# Altium PCB BMS.PcbDoc (part 1 of 2)
Units mm, origin at the board's own origin, x right, y up, seen from the top; angles counter-clockwise.
Board outline 65 x 65 mm, 2 copper layers (Top Layer, Bottom Layer); 122 components, 118 nets, 436 pads, 115 vias.
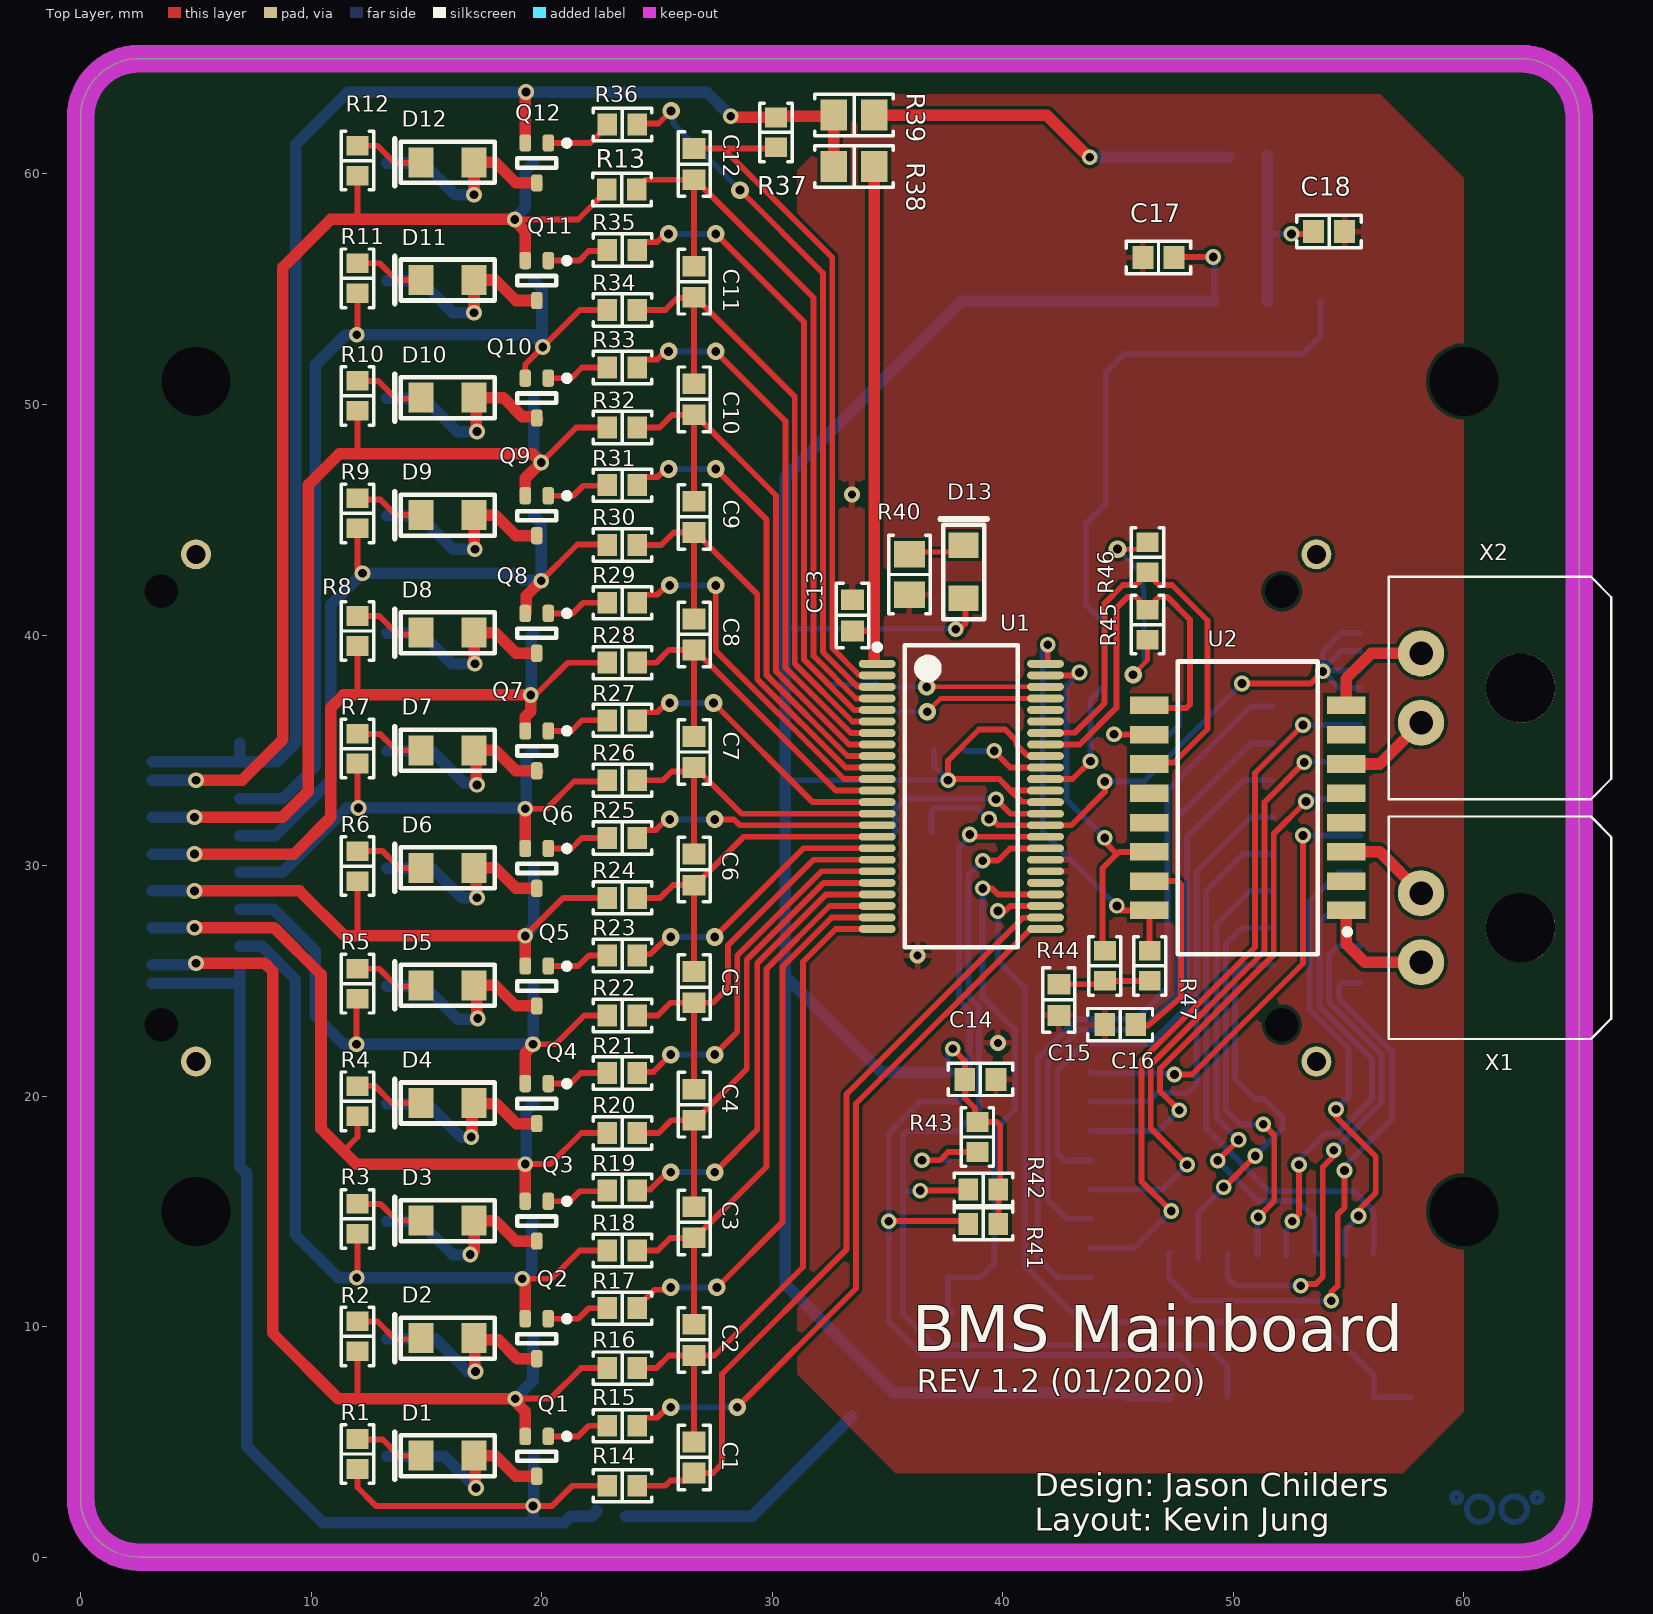
[diagram p0: Top Layer view]
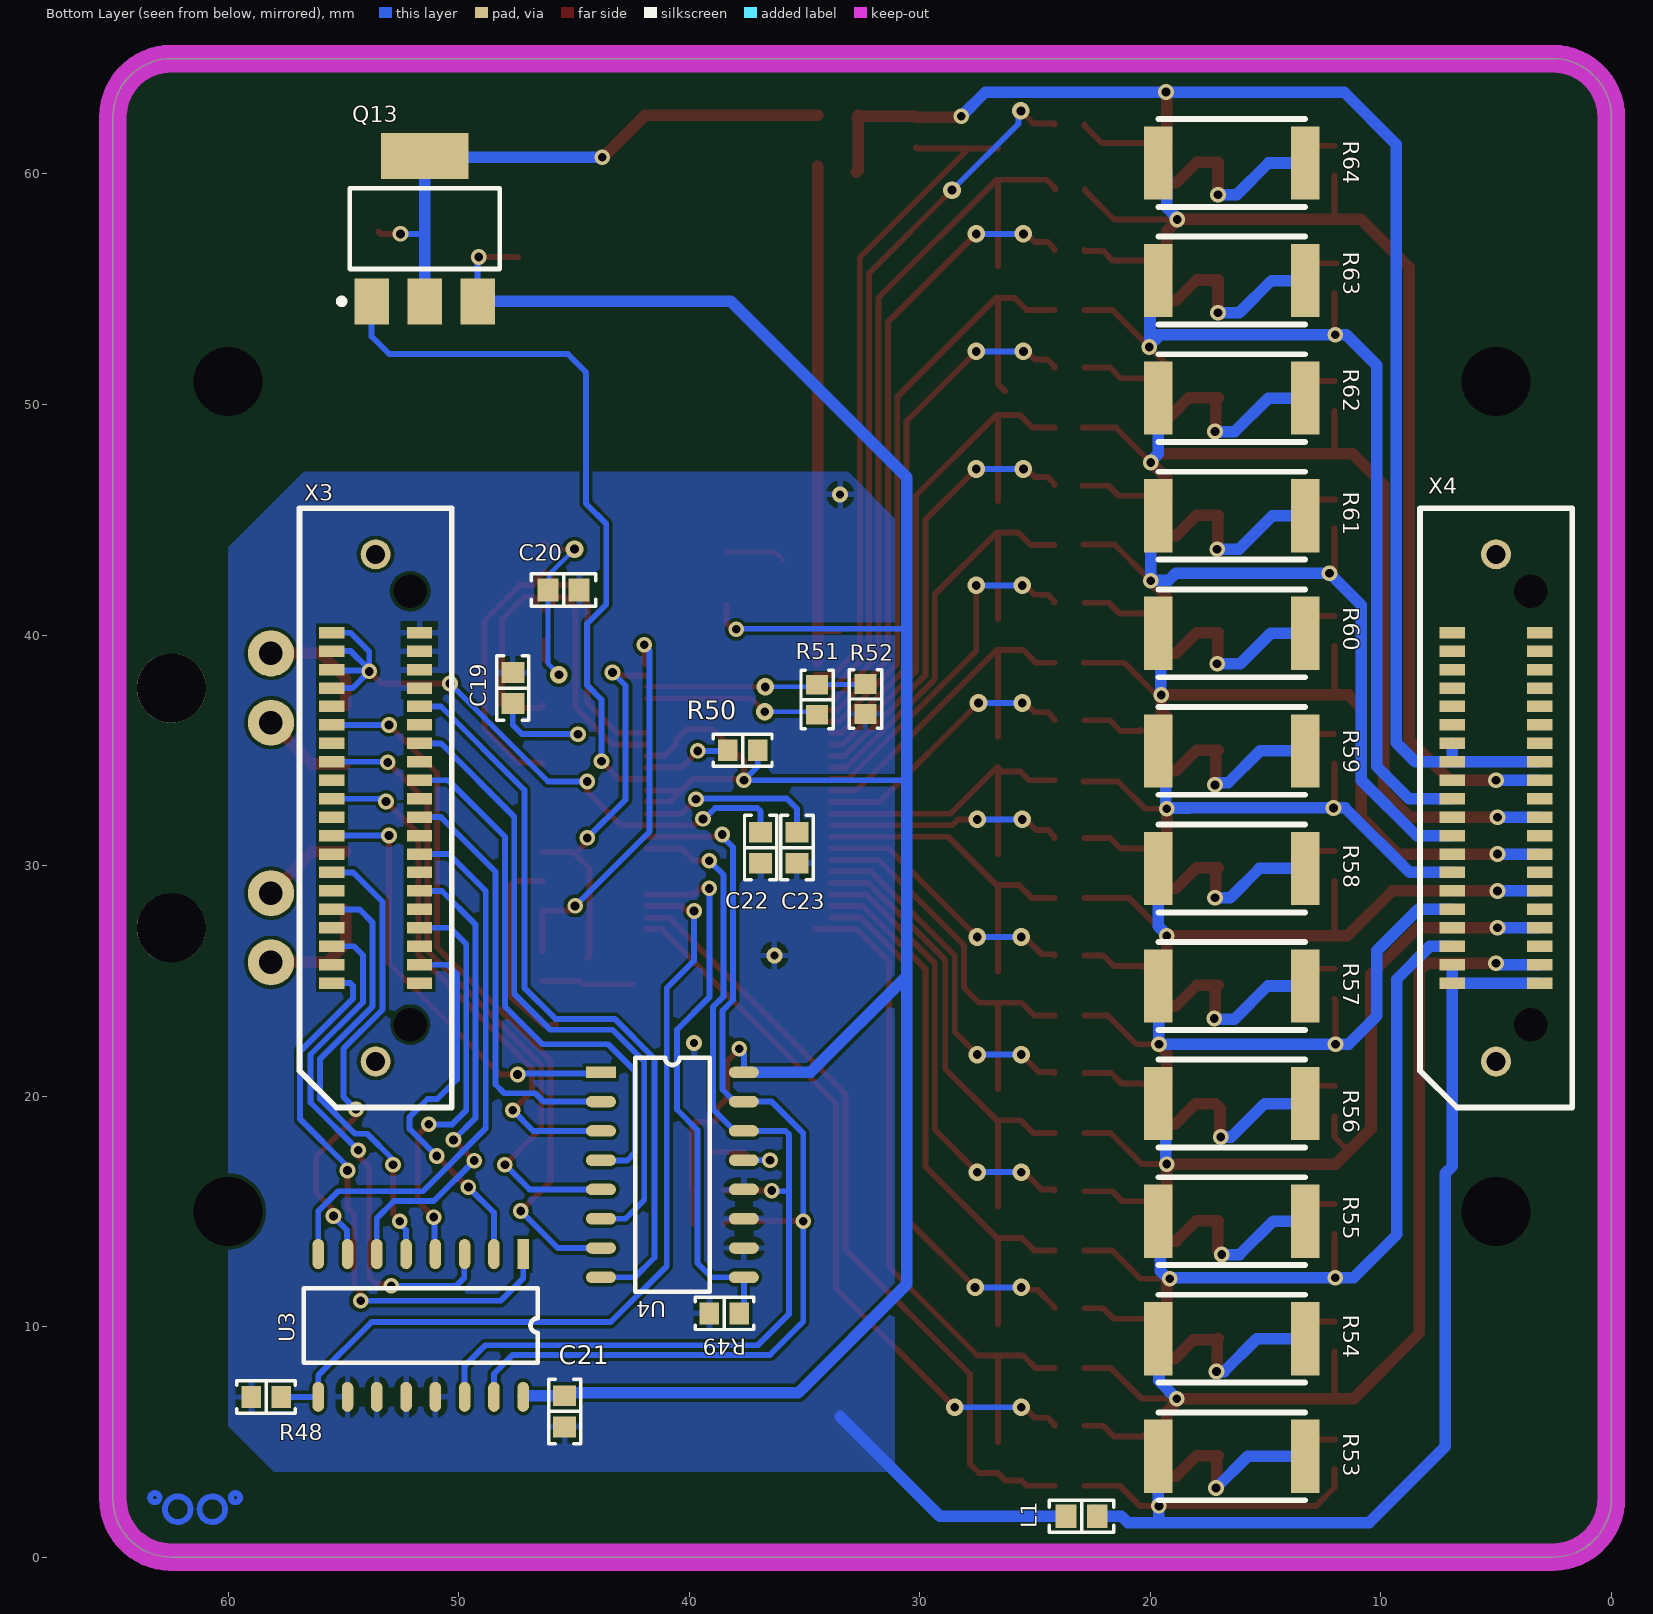
[diagram p1: Bottom Layer view, seen from below]
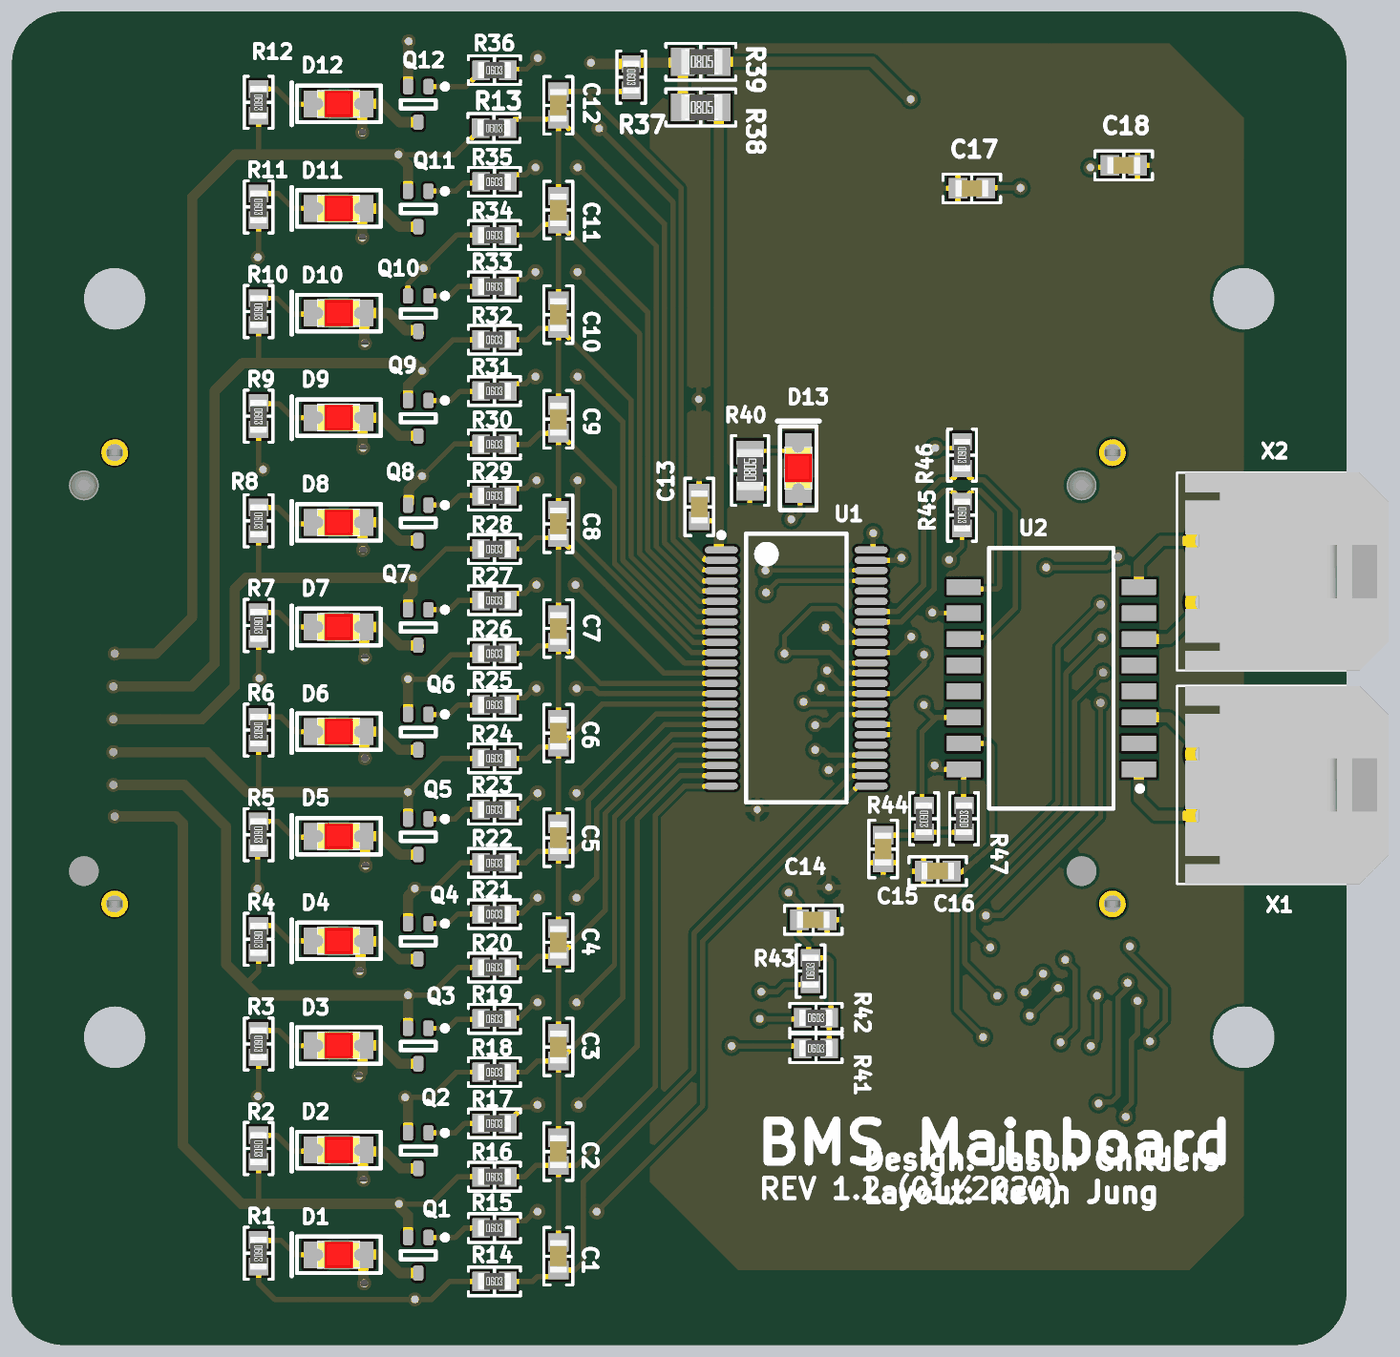
[diagram p2: 3D render of the assembled board from above, using the file's embedded part models]
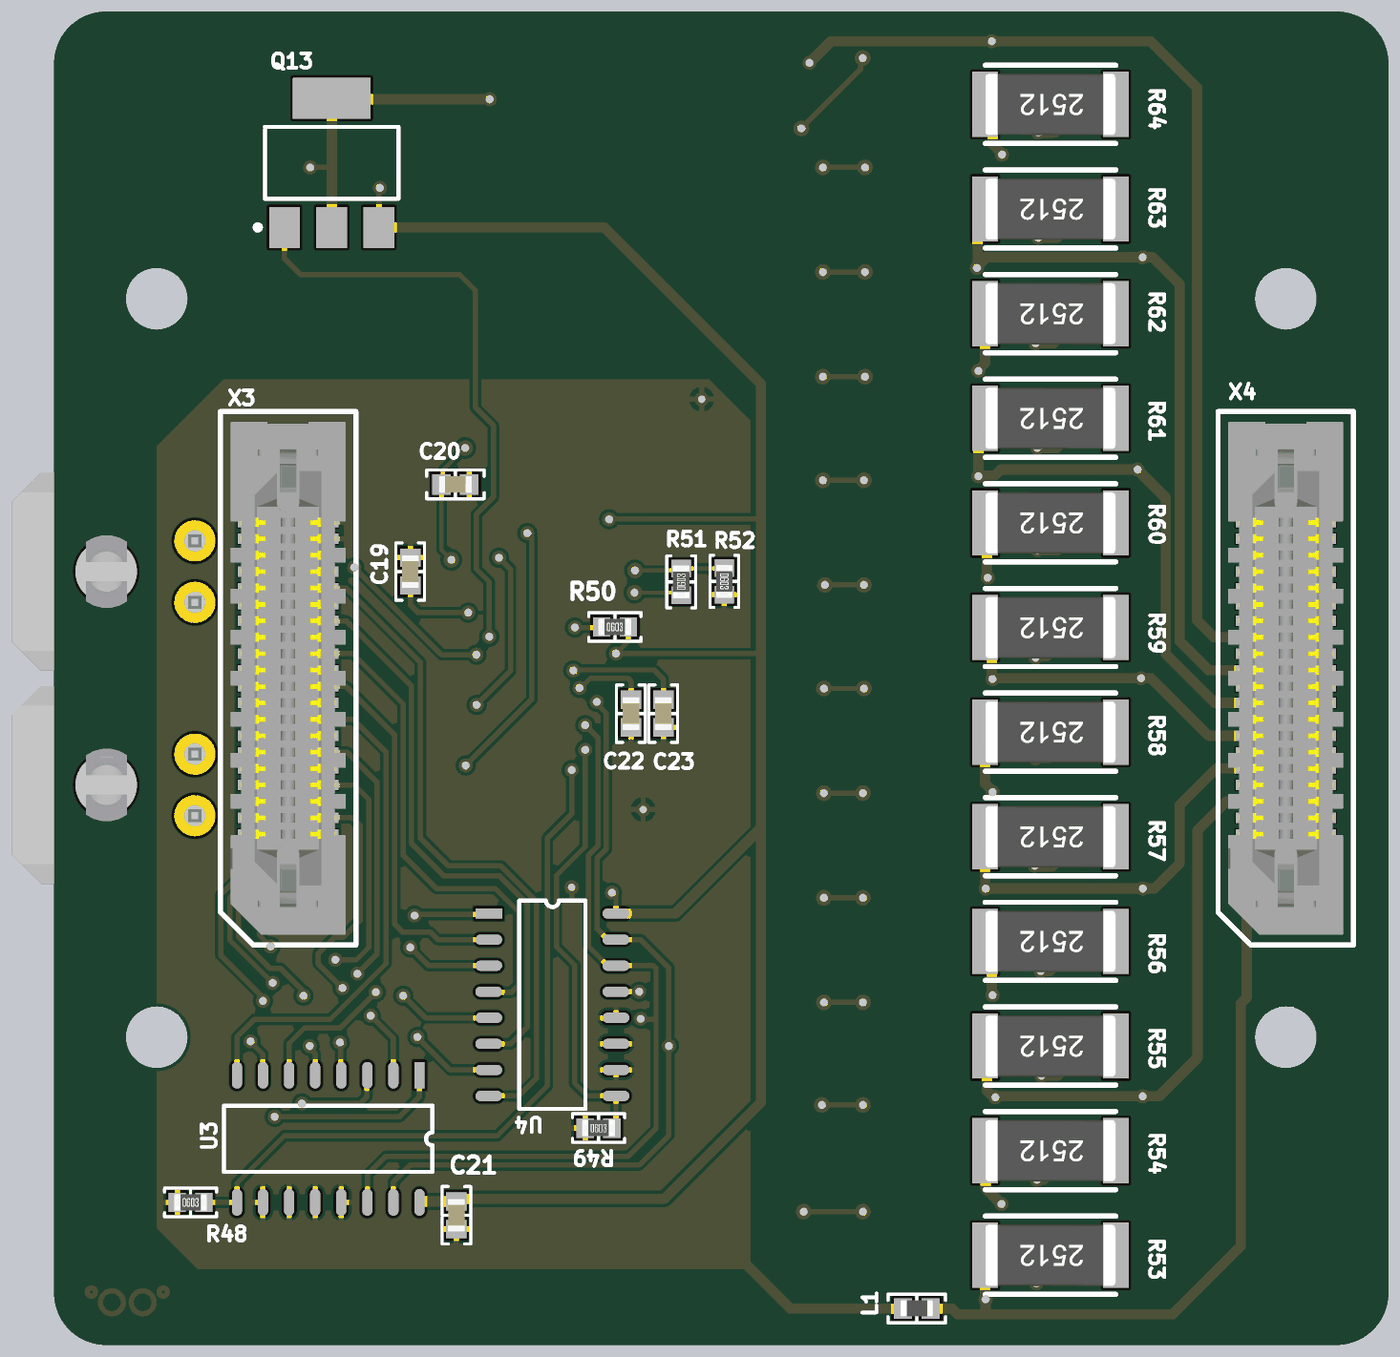
[diagram p3: 3D render of the assembled board from below, using the file's embedded part models]

## Layer stack, top to bottom
Top Solder: solder mask 0.0102, Solder Resist, Dk 3.5
Top Layer: signal copper 0.0356
Dielectric 1: dielectric 0.32, FR-4, Dk 4.8
Bottom Layer: signal copper 0.0356
Bottom Solder: solder mask 0.0102, Solder Resist, Dk 3.5

## Board outline
0,62.46 cw(c2.54,62.46) 2.54,65 62.46,65 cw(c62.46,62.46) 65,62.46 65,2.54 cw(c62.46,2.54) 62.46,0 2.54,0 cw(c2.54,2.54) 0,2.54

## Design rules (kind name [scope] priority, off if disabled: settings)
Clearance [InNetClass('All Nets')] p1: gap=0.152 ignorepadtopadclearanceinfootprint=FALSE
DiffPairsRouting [All] p1: maxlimit=0.254 minlimit=0.254 mostfreqgap=0.254 toplayer_minwidth=0.381 toplayer_maxwidth=0.381 toplayer_prefwidth=0.381 bottomlayer_minwidth=0.381 bottomlayer_maxwidth=0.381 bottomlayer_prefwidth=0.381 substack1={5F463602-B0C7-4AC7-B47F-F034FF478B31} toplayer_{5f463602-b0c7-4ac7-b47f-f034ff478b31}_minwidth=0.381 toplayer_{5f463602-b0c7-4ac7-b47f-f034ff478b31}_maxwidth=0.381 toplayer_{5f463602-b0c7-4ac7-b47f-f034ff478b31}_prefwidth=0.381 bottomlayer_{5f463602-b0c7-4ac7-b47f-f034ff478b31}_minwidth=0.381 bottomlayer_{5f463602-b0c7-4ac7-b47f-f034ff478b31}_maxwidth=0.381 bottomlayer_{5f463602-b0c7-4ac7-b47f-f034ff478b31}_prefwidth=0.381 substack2={270618F0-2C6A-46BE-B8F6-60318FFDE46E} toplayer_{270618f0-2c6a-46be-b8f6-60318ffde46e}_minwidth=0.381 toplayer_{270618f0-2c6a-46be-b8f6-60318ffde46e}_maxwidth=0.381 toplayer_{270618f0-2c6a-46be-b8f6-60318ffde46e}_prefwidth=0.381 bottomlayer_{270618f0-2c6a-46be-b8f6-60318ffde46e}_minwidth=0.381 bottomlayer_{270618f0-2c6a-46be-b8f6-60318ffde46e}_maxwidth=0.381 bottomlayer_{270618f0-2c6a-46be-b8f6-60318ffde46e}_prefwidth=0.381 maxuncoupledlength=12.7
FabricationTestPointUsage TestPointUsage [All] p1: valid=0 allowmultiple=FALSE
FabricationTestpoint Testpoint [All] p1: side=3 testpointundercomponent=TRUE minsize=1.016 maxsize=2.54 preferedsize=1.524 minholesize=0.508 maxholesize=1.016 preferedholesize=0.813 testpointgrid=0.025 allowsidetop=TRUE allowsidebottom=TRUE usegrid=TRUE gridtolerance=0
HoleSize [All] p1: absolutevalues=TRUE maxlimit=6.274 minlimit=0.254 maxpercent=80.000 minpercent=20.000
PasteMaskExpansion PasteMaskExpansion_1 [InComponent('P1')] p1: expansion=-3.81
PasteMaskExpansion [All] p2: expansion=0
PlaneClearance [All] p1: clearance=0.127
PlaneConnect [All] p1: planeconnectstyle=Relief reliefexpansion=0.381 reliefentries=4 reliefconductorwidth=0.254 reliefairgap=0.254
PolygonConnect [All] p1: connectstyle=Relief reliefconductorwidth=0.254 reliefentries=4 polygonreliefangle="90 Angle" airgapwidth=0.254
RoutingVias [All] p1: holewidth=0.381 width=0.762 viastyle="Through Hole" minholewidth=0.254 minwidth=0.508 maxholewidth=0.381 maxwidth=1.27
SilkToSolderMaskClearance SilkscreenOverComponentPads [IsPad] p1: minsilkscreentomaskgap=0.254 clearancetoexposedcopper=TRUE
SolderMaskExpansion [All] p1: expansion=0.127 istentingtop=FALSE
UnRoutedNet [All] p1: checkbadconnections=TRUE
Width [All] p1: maxlimit=3.81 minlimit=0.152 preferedwidth=0.254 substack1={5F463602-B0C7-4AC7-B47F-F034FF478B31} substack2={270618F0-2C6A-46BE-B8F6-60318FFDE46E}
21 further rules are at their usual default settings.

## Classes and differential pairs
channel class disch: dis1 dis2 dis3 dis4 dis5 dis6 dis7 dis8 dis9 dis10 dis11 dis12
component class top_new: C11 C12 C13 C14 C15 C17 C20 C21 C22 C23 D13 DS1 L1 Q13 R33 R46 R47 R49 R51 R53 R55 R59 R60 R61 R62 R63 R64 U4 X4
component class temps: C14 C21 R41 R42 R47 R49 U2 U4 X3
component class dis12: D12 Q12 R36 R64
component class dis11: D11 Q11 R33 R63 R64
component class dis10: D10 Q10 R33 R55 R62
component class dis9: D9 Q9 R25 R27 R61
component class dis8: D8 Q8 R59 R60
component class dis7: D7 Q7 R21 R27 R59
component class dis6: D6 Q6 R17 R62 R63
component class dis5: D5 Q5 R15 R33 R51
component class dis4: D4 Q4 R33 R36 R55
component class dis3: D3 Q3 R21 R27 R55
component class dis2: D2 Q2 R17 R62 R63
component class dis1: D1 Q1 R3 R53
component class U_ISO_Transformer: C20 C21 C22 C23 R46 R47 R49 U2 X1 X2

## Components (designator, comment, footprint, x,y, rotation, side; value= is the part's Value field where it differs from the comment)
C1 "capacitor" 0603 26.612,4.325 r90 top (schematic designator C18)
C2 "capacitor" 0603 26.612,9.425 r90 top (schematic designator C17)
C3 "capacitor" 0603 26.612,14.525 r90 top (schematic designator C16)
C4 "capacitor" 0603 26.612,19.625 r90 top (schematic designator C15)
C5 "capacitor" 0603 26.612,24.725 r90 top (schematic designator C14)
C6 "capacitor" 0603 26.612,29.825 r90 top (schematic designator C13)
C7 "capacitor" 0603 26.612,34.925 r90 top (schematic designator C12)
C8 "capacitor" 0603 26.612,40.025 r90 top (schematic designator C11)
C9 "capacitor" 0603 26.612,45.125 r90 top (schematic designator C10)
C10 "capacitor" 0603 26.612,50.225 r90 top (schematic designator C9)
C11 "capacitor" 0603 26.612,55.325 r90 top (schematic designator C8)
C12 "capacitor" 0603 26.612,60.425 r90 top (schematic designator C7)
C13 "capacitor" 0603 33.475,40.85 r270 top (schematic designator C5)
C14 "capacitor" 0603 39.028,20.725 r180 top (schematic designator C23)
C15 "capacitor" 0603 42.429,24.175 r90 top (schematic designator C1)
C16 "capacitor" 0603 45.092,23.1 r0 top (schematic designator C2)
C17 "capacitor" 0603 46.752,56.378 r0 top (schematic designator C19)
C18 "capacitor" 0603 54.15,57.5 r180 top (schematic designator C6)
C19 "capacitor" 0603 47.65,37.7 r270 bottom (schematic designator C3)
C20 "capacitor" 0603 45.45,41.95 r0 bottom (schematic designator C4)
C21 "capacitor" 0603 45.4,6.325 r90 bottom (schematic designator C22)
C22 "capacitor" 0603 36.9,30.775 r90 bottom (schematic designator C21)
C23 "capacitor" 0603 35.325,30.775 r90 bottom (schematic designator C20)
D1 "LED" 0805_LED 15.912,4.4 r180 top
D2 "LED" 0805_LED 15.912,9.5 r180 top (schematic designator D1)
D3 "LED" 0805_LED 15.912,14.6 r180 top (schematic designator D1)
D4 "LED" 0805_LED 15.912,19.7 r180 top (schematic designator D1)
D5 "LED" 0805_LED 15.912,24.8 r180 top (schematic designator D1)
D6 "LED" 0805_LED 15.912,29.9 r180 top (schematic designator D1)
D7 "LED" 0805_LED 15.912,35 r180 top (schematic designator D1)
D8 "LED" 0805_LED 15.912,40.1 r180 top (schematic designator D1)
D9 "LED" 0805_LED 15.912,45.2 r180 top (schematic designator D1)
D10 "LED" 0805_LED 15.912,50.3 r180 top (schematic designator D1)
D11 "LED" 0805_LED 15.912,55.4 r180 top (schematic designator D1)
D12 "LED" 0805_LED 15.912,60.5 r180 top (schematic designator D1)
D13 "LED" 0805_LED 38.3,42.75 r90 top (schematic designator D2)
L1 "MPZ1608S221ATA00" 0603 22.975,1.775 r0 bottom
Q1 "CMUDM8005 TR PFET" "CMUDM8005 TR SOT523" 19.787,4.375 r270 top
Q2 "CMUDM8005 TR PFET" "CMUDM8005 TR SOT523" 19.787,9.475 r270 top (schematic designator Q1)
Q3 "CMUDM8005 TR PFET" "CMUDM8005 TR SOT523" 19.787,14.575 r270 top (schematic designator Q1)
Q4 "CMUDM8005 TR PFET" "CMUDM8005 TR SOT523" 19.787,19.675 r270 top (schematic designator Q1)
Q5 "CMUDM8005 TR PFET" "CMUDM8005 TR SOT523" 19.787,24.775 r270 top (schematic designator Q1)
Q6 "CMUDM8005 TR PFET" "CMUDM8005 TR SOT523" 19.787,29.875 r270 top (schematic designator Q1)
Q7 "CMUDM8005 TR PFET" "CMUDM8005 TR SOT523" 19.787,34.975 r270 top (schematic designator Q1)
Q8 "CMUDM8005 TR PFET" "CMUDM8005 TR SOT523" 19.787,40.075 r270 top (schematic designator Q1)
Q9 "CMUDM8005 TR PFET" "CMUDM8005 TR SOT523" 19.787,45.175 r270 top (schematic designator Q1)
Q10 "CMUDM8005 TR PFET" "CMUDM8005 TR SOT523" 19.787,50.275 r270 top (schematic designator Q1)
Q11 "CMUDM8005 TR PFET" "CMUDM8005 TR SOT523" 19.787,55.375 r270 top (schematic designator Q1)
Q12 "CMUDM8005 TR PFET" "CMUDM8005 TR SOT523" 19.787,60.475 r270 top (schematic designator Q1)
Q13 "NSV1C201MZ4T1G" ONSC-SOT-223-4-318E-04_V 51.475,57.625 r90 bottom (schematic designator Q2)
R1 "475" "RES 0603/1608" 12.012,4.475 r270 top (schematic designator R7)
R2 "475" "RES 0603/1608" 12.012,9.575 r270 top (schematic designator R7)
R3 "475" "RES 0603/1608" 12.012,14.675 r270 top (schematic designator R7)
R4 "475" "RES 0603/1608" 12.012,19.775 r270 top (schematic designator R7)
R5 "475" "RES 0603/1608" 12.012,24.875 r270 top (schematic designator R7)
R6 "475" "RES 0603/1608" 12.012,29.975 r270 top (schematic designator R7)
R7 "475" "RES 0603/1608" 12.012,35.075 r270 top
R8 "475" "RES 0603/1608" 12.012,40.175 r270 top (schematic designator R7)
R9 "475" "RES 0603/1608" 12.012,45.275 r270 top (schematic designator R7)
R10 "475" "RES 0603/1608" 12.012,50.375 r270 top (schematic designator R7)
R11 "475" "RES 0603/1608" 12.012,55.475 r270 top (schematic designator R7)
R12 "475" "RES 0603/1608" 12.012,60.575 r270 top (schematic designator R7)
R13 "100" "RES 0603/1608" 23.475,59.325 r0 top (schematic designator R18)
R14 "100" "RES 0603/1608" 23.5,3.1 r0 top (schematic designator R31)
R15 "3.3k" "RES 0603/1608" 23.5,5.7 r0 top (schematic designator R5)
R16 "100" "RES 0603/1608" 23.5,8.2 r0 top (schematic designator R30)
R17 "3.3k" "RES 0603/1608" 23.5,10.8 r0 top (schematic designator R5)
R18 "100" "RES 0603/1608" 23.5,13.3 r0 top (schematic designator R29)
R19 "3.3k" "RES 0603/1608" 23.5,15.9 r0 top (schematic designator R5)
R20 "100" "RES 0603/1608" 23.5,18.4 r0 top (schematic designator R28)
R21 "3.3k" "RES 0603/1608" 23.5,21 r0 top (schematic designator R5)
R22 "100" "RES 0603/1608" 23.5,23.5 r0 top (schematic designator R27)
R23 "3.3k" "RES 0603/1608" 23.5,26.1 r0 top (schematic designator R5)
R24 "100" "RES 0603/1608" 23.5,28.6 r0 top (schematic designator R26)
R25 "3.3k" "RES 0603/1608" 23.5,31.2 r0 top (schematic designator R5)
R26 "100" "RES 0603/1608" 23.5,33.7 r0 top (schematic designator R25)
R27 "3.3k" "RES 0603/1608" 23.5,36.3 r0 top (schematic designator R5)
R28 "100" "RES 0603/1608" 23.5,38.8 r0 top (schematic designator R24)
R29 "3.3k" "RES 0603/1608" 23.5,41.4 r0 top (schematic designator R5)
R30 "100" "RES 0603/1608" 23.5,43.9 r0 top (schematic designator R22)
R31 "3.3k" "RES 0603/1608" 23.5,46.5 r0 top (schematic designator R5)
R32 "100" "RES 0603/1608" 23.5,49 r0 top (schematic designator R21)
R33 "3.3k" "RES 0603/1608" 23.5,51.6 r0 top (schematic designator R5)
R34 "100" "RES 0603/1608" 23.5,54.1 r0 top (schematic designator R20)
R35 "3.3k" "RES 0603/1608" 23.5,56.7 r0 top (schematic designator R5)
R36 "3.3k" "RES 0603/1608" 23.5,62.14 r0 top (schematic designator R5)
R37 "100" "RES 0603/1608" 30.162,61.8 r270 top (schematic designator R17)
R38 "100" "RES 0805/2012" 33.55,60.325 r0 top (schematic designator R14)
R39 "100" "RES 0805/2012" 33.55,62.55 r0 top (schematic designator R13)
R40 "475" "RES 0805/2012" 35.95,42.625 r90 top (schematic designator R23)
R41 "4.7k" "RES 0603/1608" 39.158,14.459 r0 top (schematic designator R8)
R42 "4.7k" "RES 0603/1608" 39.158,15.95 r0 top (schematic designator R9)
R43 "10k" "RES 0603/1608" 38.895,18.225 r90 top (schematic designator R11)
R44 "60.4" "RES 0603/1608" 44.425,25.65 r270 top (schematic designator R2)
R45 "60.4" "RES 0603/1608" 46.275,40.45 r270 top (schematic designator R4)
R46 "60.4" "RES 0603/1608" 46.275,43.375 r270 top (schematic designator R3)
R47 "60.4" "RES 0603/1608" 46.375,25.65 r90 top (schematic designator R1)
R48 "10k" "RES 0603/1608" 58.35,6.95 r180 bottom (schematic designator R10)
R49 "10k" "RES 0603/1608" 38.475,10.575 r180 bottom (schematic designator R12)
R50 "1M" "RES 0603/1608" 37.678,35 r180 bottom (schematic designator R19)
R51 "1.4k" "RES 0603/1608" 34.45,37.2 r90 bottom (schematic designator R15)
R52 "600" "RES 0603/1608" 32.35,37.225 r270 bottom (schematic designator R16)
R53 "33" "RES 2512/6332" 16.462,4.375 r0 bottom (schematic designator R6)
R54 "33" "RES 2512/6332" 16.462,9.475 r0 bottom (schematic designator R6)
R55 "33" "RES 2512/6332" 16.462,14.575 r0 bottom (schematic designator R6)
R56 "33" "RES 2512/6332" 16.462,19.675 r0 bottom (schematic designator R6)
R57 "33" "RES 2512/6332" 16.462,24.775 r0 bottom (schematic designator R6)
R58 "33" "RES 2512/6332" 16.462,29.875 r0 bottom (schematic designator R6)
R59 "33" "RES 2512/6332" 16.462,34.975 r0 bottom (schematic designator R6)
R60 "33" "RES 2512/6332" 16.462,40.075 r0 bottom (schematic designator R6)
R61 "33" "RES 2512/6332" 16.462,45.175 r0 bottom (schematic designator R6)
R62 "33" "RES 2512/6332" 16.462,50.275 r0 bottom (schematic designator R6)
R63 "33" "RES 2512/6332" 16.462,55.375 r0 bottom (schematic designator R6)
R64 "33" "RES 2512/6332" 16.462,60.475 r0 bottom (schematic designator R6)
U1 "LTC6811-1" LTC6811-1 38.2,33 r0 top locked (schematic designator U4)
U2 "HX1188NL" PULS-MODULE-16_V 50.625,32.5 r180 top locked (schematic designator U1)
U3 "LTC1380CSTR" LTC1380CSTR 47.2,13.15 r270 bottom locked (schematic designator U2)
U4 "LTC1380CSTR" LTC1380CSTR 43.825,21.03 r180 bottom locked (schematic designator U3)
X1 "*" "CONN 43650-0200 MOLEX 2PIN" 62.46,27.3 r90 top
X2 "*" "CONN 43650-0200 MOLEX 2PIN" 62.46,37.7 r90 top
X3 "ERM8-020-XX.X-X-DV-L" ERM8-020-XX.X-X-DV-L 53.6,32.5 r90 bottom locked
X4 "ERM8-020-XX.X-X-DV-L" ERM8-020-XX.X-X-DV-L 5,32.5 r90 bottom

## Footprints (in the part's own frame and the unit in brackets; to place one, negate y for a bottom-side part, rotate by r counter-clockwise, add the part's x,y. Pads: shape width x height; smd on the part's side, far side on the other; paste and mask are expansions set on the pad)
0603 [mm]
  rect 0.9x1 smd: 1(-0.675,0) 2(0.675,0)
  silkscreen extent -1.4,-0.7 1.4,0.7, body extent -0.8,-0.41 0.8,0.41, height 0.82
0805_LED [mm]
  rect 1.1x1.3 smd: 1(-1.15,0) 2(1.15,0)
  silkscreen extent -2.06,-1.02 2.29,1.02, body extent -1.05,-0.67 1.05,0.68, height 0.9
"CMUDM8005 TR SOT523" [mm] "SOT523, 3-Leads, Body 1.60x1.60mm (avg), Pitch 1.00mm, IPC Medium Density"
  rrect50% 0.75x0.5 smd: 1(-0.865,0.5) 2(-0.865,-0.5) 3(0.865,0)
  silkscreen extent -0.99,-0.85 0.2,1.43, body extent -0.49,-0.85 0.49,0.85, height 0.78
"CONN 43650-0200 MOLEX 2PIN" [mm] "MOLEX-43650-0200, 2PIN"
  round 2 hole 1.02: 1(-1.5,4.32) 2(1.5,4.32)
  round 3 hole 3 unplated: MH(0,0)
  silkscreen extent -4.82,-3.94 4.83,5.71, body extent -4.82,-4.58 4.83,5.32, height 5.62
ERM8-020-XX.X-X-DV-L [mm]
  rect 0.5x1.1 smd mask+0.05: 1(-7.6,1.9) 2(-7.6,-1.9) 3(-6.8,1.9) 4(-6.8,-1.9) 5(-6,1.9) 6(-6,-1.9) 7(-5.2,1.9) 8(-5.2,-1.9) 9(-4.4,1.9) 10(-4.4,-1.9) 11(-3.6,1.9) 12(-3.6,-1.9) 13(-2.8,1.9) 14(-2.8,-1.9) 15(-2,1.9) 16(-2,-1.9) 17(-1.2,1.9) 18(-1.2,-1.9) 19(-0.4,1.9) 20(-0.4,-1.9) 21(0.4,1.9) 22(0.4,-1.9) 23(1.2,1.9) 24(1.2,-1.9) 25(2,1.9) 26(2,-1.9) 27(2.8,1.9) 28(2.8,-1.9) 29(3.6,1.9) 30(3.6,-1.9) 31(4.4,1.9) 32(4.4,-1.9) 33(5.2,1.9) 34(5.2,-1.9) 35(6,1.9) 36(6,-1.9) 37(6.8,1.9) 38(6.8,-1.9) 39(7.6,1.9) 40(7.6,-1.9)
  round 1.3 hole 0.83 mask+0.075: G1(-11,0) G2(11,0)
  round 0 hole 1.45 unplated: MH1(-9.4,-1.5) MH2(9.4,-1.5)
  silkscreen extent -13,-3.3 13,3.3, body extent -12.5,-2.8 12.5,2.8, height 8.71
LTC1380CSTR [mm]
  rect 1.3x0.5 smd: 1(0,0)
  oval 1.3x0.5 smd: 2(0,-1.27) 3(0,-2.54) 4(0,-3.81) 5(0,-5.08) 6(0,-6.35) 7(0,-7.62) 8(0,-8.89) 9(6.197,-8.89) 10(6.197,-7.62) 11(6.197,-6.35) 12(6.197,-5.08) 13(6.197,-3.81) 14(6.197,-2.54) 15(6.197,-1.27) 16(6.197,0)
  silkscreen extent 1.49,-9.53 4.71,0.63
LTC6811-1 [mm]
  oval 1.6x0.34 smd: 1(-3.65,5.75) 2(-3.65,5.25) 3(-3.65,4.75) 4(-3.65,4.25) 5(-3.65,3.75) 6(-3.65,3.25) 7(-3.65,2.75) 8(-3.65,2.25) 9(-3.65,1.75) 10(-3.65,1.25) 11(-3.65,0.75) 12(-3.65,0.25) 13(-3.65,-0.25) 14(-3.65,-0.75) 15(-3.65,-1.25) 16(-3.65,-1.75) 17(-3.65,-2.25) 18(-3.65,-2.75) 19(-3.65,-3.25) 20(-3.65,-3.75) 21(-3.65,-4.25) 22(-3.65,-4.75) 23(-3.65,-5.25) 24(-3.65,-5.75) 25(3.65,-5.75) 26(3.65,-5.25) 27(3.65,-4.75) 28(3.65,-4.25) 29(3.65,-3.75) 30(3.65,-3.25) 31(3.65,-2.75) 32(3.65,-2.25) 33(3.65,-1.75) 34(3.65,-1.25) 35(3.65,-0.75) 36(3.65,-0.25) 37(3.65,0.25) 38(3.65,0.75) 39(3.65,1.25) 40(3.65,1.75) 41(3.65,2.25) 42(3.65,2.75) 43(3.65,3.25) 44(3.65,3.75) 45(3.65,4.25) 46(3.65,4.75) 47(3.65,5.25) 48(3.65,5.75)
  silkscreen extent -3.77,-6.55 2.45,6.6, body extent -2.85,-6.55 2.85,6.55, height 2
ONSC-SOT-223-4-318E-04_V [mm] "SOT223, 4-Leads, Body 6.5x3.5mm, Pitch 2.3mm"
  rect 2x1.5 smd: 1(-3.15,2.3) 2(-3.15,0) 3(-3.15,-2.3)
  rect 2x3.8 smd: 4(3.15,0)
  silkscreen extent -3.27,-3.25 1.75,3.73, body extent -1.75,-3.25 1.75,3.25, height 1.75
PULS-MODULE-16_V [mm] "SOIC, 16-Leads, Body 12.7x7.11mm, Pitch 1.27mm"
  rect 1.67x0.76 smd paste+0: 1(-4.265,4.445) 2(-4.265,3.175) 3(-4.265,1.905) 4(-4.265,0.635) 5(-4.265,-0.635) 6(-4.265,-1.905) 7(-4.265,-3.175) 8(-4.265,-4.445) 9(4.265,-4.445) 10(4.265,-3.175) 11(4.265,-1.905) 12(4.265,-0.635) 13(4.265,0.635) 14(4.265,1.905) 15(4.265,3.175) 16(4.265,4.445)
  silkscreen extent -4.44,-6.35 3.03,6.35, body extent -3.55,-6.35 3.55,6.35, height 5.97
"RES 0603/1608" [mm] "Chip Resistor, 2-Leads, Body 1.60x0.80mm, IPC Medium Density"
  rect 0.85x0.95 smd: 1(-0.65,0) 2(0.65,0)
  silkscreen extent -1.27,-0.7 1.27,0.7, body extent -0.8,-0.4 0.8,0.4, height 0.45
"RES 0805/2012" [mm] "Chip Resistor, 2-Leads, Body 2.00x1.25mm, IPC Medium Density"
  rect 1.15x1.35 smd: 1(-0.875,0) 2(0.875,0)
  silkscreen extent -1.7,-0.9 1.7,0.9, body extent -0.95,-0.62 1.05,0.63, height 0.6
"RES 2512/6332" [mil]
  rect 49x125 smd: 1(-125.5,0) 2(125.5,0)
  silkscreen extent -125,-75 125,75, body extent -125,-59 125,59, height 63

## Part data
C1 C2 C3 C4 C5 C6 C7 C8 C9 C10 C11 C12 C15 C16 C19 C20: library part 1, "Generic 0603 capacitor", capacitance=10nF, Dielectric=Ceramic, Package=0603, percent tolerance=10, voltage=50, ESR=1, id=1, Name="0603 Capacitor", quantity=0
C13 C14 C18 C21: library part 1, "Generic 0603 capacitor", capacitance=.1uF, Dielectric=Ceramic, Package=0603, percent tolerance=10, voltage=50, ESR=1, id=1, Name="0603 Capacitor", quantity=0
C17 C22 C23: library part 1, "Generic 0603 capacitor", capacitance=1uF, Dielectric=Ceramic, Package=0603, percent tolerance=10, voltage=50, ESR=1, id=1, Name="0603 Capacitor", quantity=0
D1 D2 D3 D4 D5 D6 D7 D8 D9 D10 D11 D12 D13: library part 19, "Generic 0805 LED", Package=0805, id=19, Name="0805 LED", numcircuits=1, quantity=0, vr=1
L1: library part 10, "220 Ohms @ 100MHz 1 Power Line Ferrite Bead 0", Package=0603, resistance=50mOhm, Tolerance=0, createdby=Kevin, Digi-Key_Part_Number=445-1565-1-ND, Digi-Key_Purchase_URL=https://www.digikey.com/product-detail/en/tdk-corporation/MPZ1608S221ATA00/445-1565-1-ND/571895?utm_source=snapeda&utm_medium=aggregator&utm_campaign=symbol, id=10, imax=2.20000004768372, Link=https://www.digikey.com/product-detail/en/tdk-corporation/MPZ1608S221ATA00/445-1565-1-ND/571895, MF=TDK, MP=MPZ1608S221ATA00, Name=MPZ1608S221ATA00, quantity=0, SnapEDA_Link=https://www.snapeda.com/parts/MPZ1608S221ATA00/TDK-Lambda%20Americas%20Inc/view-part/?ref=snap
Q1 Q2 Q3 Q4 Q5 Q6 Q7 Q8 Q9 Q10 Q11 Q12: library part 13, "MOSFET P-CH 20V 650MA SOT523", current=650mA, Package=SOT-523, id=13, Link=https://www.digikey.com/product-detail/en/central-semiconductor-corp/CMUDM8005-TR/CMUDM8005CT-ND/5324590, Name="CMUDM8005 TR PFET", numcircuits=1, quantity=0, rdson=360m, Type=P_Channel, vdsmax=0, vgsmax=8
Q13: library part CMP-1048-00450-1, "100 V, 2 A, Low VCE(sat), NPN Transistor, 4-Pin SOT-223, Pb-Free, Tape and Reel", Manufacturer="On Semiconductor", ComponentLink1Description="Manufacturer URL", ComponentLink1URL=http://www.onsemi.com/, ComponentLink2Description=Datasheet, ComponentLink2URL=http://www.onsemi.cn/pub_link/Collateral/NSS1C201MZ4-D.PDF, ComponentLink3Description="Package Specification", ComponentLink3URL=http://www.onsemi.com/pub_link/Collateral/318E-04.PDF, DatasheetVersion="Rev. 4", IC Continuous (A)=2, Mounting Technology="Surface Mount", Note1=0, PackageDescription="4-Pin Small Outline Transistor, Body 6.5 x 3.5 mm, Pitch 2.3 mm", PackageReference=SOT-223-4-318E-04, PackageVersion="Rev. N, 08/2009", Packing="Tape and Reel", PartNumber=NSV1C201MZ4T1G, Polarity=NPN, RoHS=TRUE
R1 R2 R3 R4 R5 R6 R7 R8 R9 R10 R11 R12 R13 R14 R15 R16 R17 R18 R19 R20 R21 R22 R23 R24 R25 R26 R27 R28 R29 R30 R31 R32 R33 R34 R35 R36 R37 R41 R42 R43 R44 R45 R46 R47 R48 R49 R50 R51 R52: library part 1, Package=0603, percent tolerance=5, id=1, Name="0603 Resistor", quantity=0
  R1 R2 R3 R4 R5 R6 R7 R8 R9 R10 R11 R12: resistance=475
  R13 R14 R16 R18 R20 R22 R24 R26 R28 R30 R32 R34 R37: resistance=100
  R15 R17 R19 R21 R23 R25 R27 R29 R31 R33 R35 R36: resistance=3.3k
  R41 R42: resistance=4.7k
  R43 R48 R49: resistance=10k
  R44 R45 R46 R47: resistance=60.4
  R50: resistance=1M
  R51: resistance=1.4k
  R52: resistance=600
R38 R39 R40: library part 2, Package=0805, percent tolerance=5, createdby=Kevin, id=2, Name="0805 Resistor", quantity=0
  R38 R39: resistance=100
  R40: resistance=475
R53 R54 R55 R56 R57 R58 R59 R60 R61 R62 R63 R64: library part 4, Package=2512, percent tolerance=5, createdby=Kevin, id=4, Name="2512 Resistor", quantity=0, resistance=33
U1: library part 37, Package=SSOP, voltageinmax=55, id=37, Link=https://www.analog.com/media/en/technical-documentation/data-sheets/68111fb.pdf, Name=LTC6811-1, quantity=0, vcc=40
U2: library part CMP-2000-05323-1, "10/100 Base-T Single Port Surface Mount Magnetic with Turns Ratio, -40 to 85 degC, 16-Pin Module, RoHS, Tube", Inductance=-, Manufacturer="Pulse Electronics", Package Description="16-Pin Surface Mount Device, Body 12.7 x 7.11 mm, Pitch 1.27 mm", Package Reference=MODULE-16, Standard Package=40, Category=Transformers, Datasheet URL=https://datasheet.ciiva.com/26929/hx1188nl-26929858.pdf, Datasheet Version="Rev. H325.Q, 09/2009", E.T.=-, Family=PulseTransformers, Height - Seated (Max)=6.22mm, Manufacturer URL=http://www.pulseelectronics.com/, Mounting Type=SurfaceMount, Online Catalog=10/100BASE-TSinglePort, Other Names=553-1340, Other Related Documents=PackagesFNLvs.NL, PCN Design/Specification=ThermoplasticHeaderDesign28/Jun/2013, PCN Other=HaloInjunctionRes1/Sep/2015, Series=-, Size / Dimension=12.70mmLx7.11mmW, Transformer Type=IsolationandDataInterface(Encapsulated), Turns Ratio - Primary=Secondary:1:1Transmitter,1:1Receiver
U3 U4: library part 39, "8:1 analog multiplexer. I2C interface. 2 address pins.", Package=SOIC-16, voltageinmax=5, createdby="Haley Pierce", id=39, Link=https://www.mouser.com/ProductDetail/Analog-Devices-Linear-Technology/LTC1380CSTR?qs=hVkxg5c3xu%2Flgahs8%252BvvEA%3D%3D, Name=LTC1380, quantity=0, updatedby=0, vcc=5
X1 X2: library part 9, "Molex 43650_0200", id=9, Link=https://www.digikey.com/product-detail/en/molex-llc/0436500200/WM1860-ND/268989, Name=0436500200, numcontacts=2, numrows=1, Pitch="3 mm", quantity=0
X3 X4: library part 34, Manufacturer=SAMTEC, CREATED="August 17, 2016 - Wendy Xin", id=34, Name=ERM8-020-XX.X-X-DV-L, numcontacts=40, numrows=2, PCB DECAL=ERM8-020-XX.X-X-DV-L, quantity=0

## Free pads (board coordinates)
  round 0 hole 3 unplated: 3(5,51) 4(5,15) 6(60,51)
  round 0 hole 3 unplated paste+5: 5(60,15)

## Via types
v1: diameter 0.681, hole 0.381, Top Layer to Bottom Layer, tented both sides, 84 vias
v2: diameter 0.762, hole 0.381, Top Layer to Bottom Layer, tented both sides, 28 vias
v3: diameter 0.7, hole 0.35, Top Layer to Bottom Layer, tented both sides, 3 vias

## Nets (pads, with @x,y where several pads share a name; then routed paths per layer and width w, separated by ;. In a path a pad name is that pad's centre, name@x,y a point inside that pad or via, vN(x,y) a via of type N, cw(c..) or ccw(c..) an arc to the next point about the centre after c; other vN are vias at no path point)
3V: C22.2 U1.34 X3.33 X3.35 X3.37 X3.39 | length 29.7
  Top Layer w0.254: v1(39.4,32.025) 39.516,32.025 39.791,31.75 U1.34 42.975,31.75 44.425,33.2 v1(44.425,33.65) ; v1(50.375,37.9) 53.353,37.9 v1(53.875,38.422)
  Bottom Layer w0.254: C22.2 36.9,32.351 37.049,32.5 38.875,32.5 39.375,32 v1(39.4,32.025) ; v1(44.425,33.65) 46.125,33.65 v1(50.375,37.9) ; X3.33 54.597,37.7 v1(53.875,38.422) ; X3.35 55.461,38.461 53.914,38.461 v1(53.875,38.422) ; X3.37 54.675,39.3 v1@53.875,38.5 ; X3.39 54.692,40.1 53.875,39.283 v1@53.875,38.5 ; v1(53.875,38.422) v1@53.875,38.5
3Vref: C23.2 U1.35 | length 8
  Top Layer w0.254: v1(39.703,32.878) 40.331,32.25 U1.35
  Bottom Layer w0.254: C23.2 35.325,32.462 35.77,32.906 39.629,32.906 39.657,32.878 v1(39.703,32.878)
5V: C14.2 C17.2 C21.2 D13.1 Q13.3 R41.2 R42.2 R43.2 R50.2 U1.36 U1.37 U1.40 U3.16 U4.16 | length 127.7
  Top Layer w0.254: v1(37.825,22.05) 38.353,21.522 C14.2 38.353,19.915 38.793,19.475 38.793,18.977 R43.2 39.739,18.875 39.887,18.726 39.887,16.029 R42.2 R41.2 ; v1(37.961,40.248) 38.123,40.248 38.375,40.5 D13.1@38.375,41.325 ; U1.36 41.834,32.766 40.834,32.766 40.35,33.25 ; U1.37 40.35,33.25 ; U1.40 41.834,34.766 41.068,34.766 40.584,35.25 40.584,35.415 40.1,35.899 38.969,35.899 37.628,34.558 v1(37.628,33.7) 37.678,33.75 39.85,33.75 40.35,33.25 ; C17.2 47.45,56.4 v1(49.125,56.4)
  Bottom Layer w0.254: 30.568,33.7 v1(37.628,33.7) 37.028,34.3 R50.2 ; 30.568,40.274 37.935,40.274 v1(37.961,40.248) ; U4.16 37.628,21.853 v1(37.825,22.05) ; v1(49.125,56.4) 49.175,56.35 Q13.3
  Bottom Layer w0.5: U4.16 34.737,21.03 30.568,25.199 ; U3.16 47.2,7 C21.2 45.275,7.125 35.275,7.125 30.568,11.832 30.568,25.199 ; Q13.3 38.195,54.475 30.568,46.848 30.568,40.274 30.568,33.7 30.568,25.199
B0: L1.1 R1.2 R14.1 R53.2 X4.1 X4.2 X4.3 | length 56.8
  Top Layer w0.254: R1.2 12.012,3.019 12.805,2.225 v1(19.625,2.225) 20.45,2.225 21.325,3.1 R14.1
  Bottom Layer w0.254: v1(19.625,2.225) v1@19.649,2.249
  Bottom Layer w0.5: X4.2 X4.1 ; X4.3 X4.1 ; v1(19.625,2.225) 19.625,1.5 ; v1@19.649,2.249 R53.2 ; L1.1@22.375,2.025 22.375,1.975 22.175,1.775 21.25,1.775 20.975,1.5 19.625,1.5 ; X4.1 6.9,16.95 7.2,16.65 7.2,4.8 10.5,1.5 19.625,1.5
B1: Q1.2 R2.2 R16.1 R54.2 X4.4 | length 44.2
  Top Layer w0.254: 11.975,6.875 12.012,6.912 R2.2 ; v1(18.85,6.875) 20.375,6.875 21.7,8.2 R16.1
  Top Layer w0.5: v1(5,25.764) 7.986,25.764 8.325,25.425 8.325,9.725 11.175,6.875 11.975,6.875 v1(18.85,6.875) 18.85,6.759 19.287,6.323 Q1.2
  Bottom Layer w0.5: X4.4 4.936,25.7 v1(5,25.764) ; v1(18.85,6.875) 19.621,7.646 19.621,9.447 R54.2
B2: Q2.2 R3.2 R18.1 R55.2 X4.5 | length 35.4
  Top Layer w0.254: v1(11.975,12.12) 12.012,12.157 R3.2 ; v1(19.15,12.075) 20.425,12.075 21.65,13.3 R18.1
  Top Layer w0.5: v1(19.15,12.075) 19.15,12.026 19.287,11.889 Q2.2
  Bottom Layer w0.254: v1@11.925,12.12 v1(11.975,12.12)
  Bottom Layer w0.5: X4.5 7.875,26.5 9.3,25.075 9.3,14 11.18,12.12 v1@11.925,12.12 ; v1(11.975,12.12) v1@19.145,12.12 ; v1(19.15,12.075) 19.125,12.1 v1@19.145,12.12 ; R55.2 19.562,14.488 19.562,12.413 19.269,12.12 v1@19.145,12.12
B3: Q3.2 R4.2 R20.1 R56.2 X4.8 | length 34.6
  Top Layer w0.254: 11.4,17.611 12.012,18.223 R4.2 ; v1(19.287,17.05) 20.375,17.05 21.725,18.4 R20.1
  Top Layer w0.5: v1(4.936,27.3) 8.4,27.3 10.425,25.275 10.425,18.586 11.4,17.611 11.961,17.05 v1(19.287,17.05) Q3.2
  Bottom Layer w0.5: X4.8 v1(4.936,27.3) ; v1(19.287,17.05) 19.321,17.085 19.321,19.347 R56.2
B4: Q4.2 R5.2 R22.1 R57.2 X4.9 | length 26.9
  Top Layer w0.254: v1(11.961,22.25) 11.961,24.175 R5.2 ; v1(19.621,22.25) 20.598,22.25 21.848,23.5 R22.1
  Top Layer w0.5: Q4.2 19.287,21.866 19.621,22.201 v1(19.621,22.25)
  Bottom Layer w0.5: X4.9 8.375,28.1 10.175,26.3 10.175,23.475 11.4,22.25 v1(11.961,22.25) v1(19.621,22.25) 19.635,22.264 19.635,24.761 R57.2
B5: Q5.2 R6.2 R24.1 R58.2 X4.12 | length 28
  Top Layer w0.254: 11.925,26.95 12.012,27.037 R6.2 ; Q5.2@19.287,25.713 Q5.2@19.325,25.675 ; v1(19.287,26.95) 20.936,28.6 R24.1
  Top Layer w0.5: v1(4.936,28.9) 9.495,28.9 11.445,26.95 11.925,26.95 v1(19.287,26.95) Q5.2@19.287,25.713
  Bottom Layer w0.5: X4.12 v1(4.936,28.9) ; v1(19.287,26.95) 19.287,26.999 19.649,27.362 R58.2
B6: Q6.2 R7.2 R26.1 R59.2 X4.13 | length 24.5
  Top Layer w0.254: R7.2 12.012,32.538 v1(12.05,32.5) ; v1(19.287,32.462) 20.212,32.462 21.4,33.65 R26.1@22.9,33.65
  Top Layer w0.5: Q6.2 v1(19.287,32.462)
  Bottom Layer w0.5: X4.13 8.75,29.7 11.55,32.5 v1(12.05,32.5) 18.325,32.5 ; 18.825,32.5 18.325,32.5 ; R59.2 19.321,34.647 19.321,32.496 v1(19.287,32.462) 19.252,32.496 18.329,32.496 18.325,32.5
B7: Q7.2 R8.2 R28.1 R60.2 X4.16 | length 32.5
  Top Layer w0.254: 12.012,37.4 R8.2 ; v1(19.519,37.4) 19.725,37.4 21.125,38.8 R28.1@22.875,38.8
  Top Layer w0.5: v1(4.936,30.5) 9.251,30.5 10.85,32.099 10.85,36.85 11.4,37.4 12.012,37.4 v1(19.519,37.4) 19.519,36.682 19.287,36.45 Q7.2
  Bottom Layer w0.5: X4.16 v1(4.936,30.5) ; v1(19.519,37.4) 19.553,37.435 19.553,39.979 R60.2
B8: Q8.2 R9.2 R30.1 R61.2 X4.17 | length 32.6
  Top Layer w0.254: R9.2 12.012,42.888 v1(12.225,42.675) ; Q8.2 Q8.2@19.321,40.975 ; v1(19.975,42.35) 21.55,43.925 R30.1@22.9,43.925
  Top Layer w0.5: Q8.2@19.321,40.975 19.321,41.696 v1(19.975,42.35)
  Bottom Layer w0.5: X4.17 8.45,31.3 10.85,33.7 10.85,41.3 v1(12.225,42.675) 18.9,42.675 19.19,42.385 19.94,42.385 v1(19.975,42.35) 19.975,44.849 R61.2
B9: Q9.2 R10.2 R32.1 R62.2 X4.20 | length 41.5
  Top Layer w0.254: 11.925,47.859 12.012,47.946 R10.2 ; v1(19.975,47.484) 21.491,49 R32.1@22.95,49
  Top Layer w0.5: v1(4.936,32.099) 8.749,32.099 9.875,33.225 9.875,46.509 11.225,47.859 11.925,47.859 19.6,47.859 v1(19.975,47.484) 19.287,46.796 Q9.2
  Bottom Layer w0.5: X4.20 v1@4.935,32.1 ; R62.2 19.649,47.859 19.975,47.533 v1(19.975,47.484)
B10: Q10.2 R11.2 R34.1 R63.2 X4.21 | length 41.9
  Top Layer w0.254: v1(11.975,53.02) 12.012,53.02 R11.2 ; Q10.2@19.275,51.1 19.287,51.112 Q10.2 19.287,51.737 v1(20.045,52.495) 21.65,54.1 R34.1
  Bottom Layer w0.5: X4.21 8.775,32.9 10.175,34.3 10.175,51.7 11.495,53.02 v1(11.975,53.02) 19.649,53.02 19.649,52.941 v1@20.011,52.579 ; R63.2 20.011,55.013 v1@20.011,52.579 ; v1(20.045,52.495) 20.011,52.53 v1@20.011,52.579
B11: Q11.2 R12.2 R13.1 R64.2 X4.24 | length 49.1
  Top Layer w0.254: 11.925,58.025 12.012,58.112 R12.2 ; v1(18.825,58.025) 21.575,58.025 22.825,59.275 R13.1
  Top Layer w0.5: v1(5,33.7) 7,33.7 8.775,35.475 8.775,55.948 10.852,58.025 11.925,58.025 v1(18.825,58.025) 18.825,57.976 19.287,57.514 Q11.2
  Bottom Layer w0.5: X4.24 v1(5,33.7) ; v1(18.825,58.025) 18.825,58.074 19.277,58.526 19.277,60.103 R64.2
B12: Q12.2 R37.1 R38.1 R39.1 X4.25 X4.26 X4.27 | length 62.9
  Top Layer w0.254: v1(28.2,62.5) v1@28.25,62.45
  Top Layer w0.5: Q12.2 19.287,63.515 v1(19.321,63.55) ; v1@28.25,62.45 R37.1 30.212,62.5 32.625,62.5 R39.1@32.675,62.45 ; R39.1 R39.1@32.675,62.45 ; R39.1@32.7,62.425 R39.1@32.675,62.45 ; R38.1@32.75,60.075 32.675,60.15 R38.1 R39.1@32.675,62.45
  Bottom Layer w0.5: X4.26 X4.25 ; X4.27 X4.25 ; v1(28.2,62.5) 27.15,63.55 v1(19.321,63.55) 11.595,63.55 9.325,61.28 9.325,35.325 8.5,34.5 X4.25
C0: C1.1 R14.2 U1.26 | length 34.1
  Top Layer w0.254: R14.2 25.358,3.1 25.584,3.327 26.288,3.327 C1.1 27.425,3.65 27.823,4.048 27.823,7.95 33.227,13.353 33.227,20.088 40.872,27.734 41.834,27.734 U1.26
C1: C1.2 C2.1 R16.2 U1.24 | length 29.8
  Top Layer w0.254: R16.2 24.966,8.2 25.516,8.75 C2.1 ; C1.2 C2.1 ; U1.24 32.75,27.25 31.329,25.83 31.329,12.587 27.492,8.75 C2.1
C2: C2.2 C3.1 R18.2 U1.22 | length 24.7
  Top Layer w0.254: R18.2 25.038,13.3 25.588,13.85 C3.1 ; C2.2 C3.1 ; U1.22@33.85,28.25 32.483,28.25 29.755,25.523 29.755,24.43 29.755,16.944 26.662,13.85 C3.1
C3: C3.2 C4.1 R20.2 U1.20 | length 20.7
  Top Layer w0.254: R20.2 25.071,18.4 25.621,18.95 C4.1 ; C3.2 C4.1 ; U1.20@33.85,29.25 32.231,29.25 28.89,25.909 28.89,24.987 28.89,21.178 26.662,18.95 C4.1
C4: C4.2 C5.1 R22.2 U1.18 | length 17.3
  Top Layer w0.254: R22.2 25.035,23.5 25.585,24.05 C5.1 ; C4.2 C5.1 ; U1.18@33.85,30.25 31.784,30.25 28.077,26.543 28.077,24.702 27.425,24.05 C5.1
C5: C5.2 C6.1 R24.2 U1.16 | length 14.5
  Top Layer w0.254: R24.2 25.14,28.6 25.69,29.15 C6.1 ; C5.2 C6.1 ; U1.16@33.85,31.25 28.761,31.25 26.662,29.15 C6.1
C6: C6.2 C7.1 R26.2 U1.14 | length 14.5
  Top Layer w0.254: R26.2 25.258,33.7 25.64,34.083 26.444,34.083 C7.1 ; C6.2 C7.1 ; U1.14@33.85,32.25 28.662,32.25 26.662,34.25 C7.1
C7: C7.2 C8.1 R28.2 U1.12 | length 16.2
  Top Layer w0.254: R28.2 24.962,38.8 25.512,39.35 C8.1 ; C7.2 C8.1 ; U1.12@33.85,33.25 32.761,33.25 26.662,39.35 C8.1
C8: C8.2 C9.1 R30.2 U1.10 | length 20.1
  Top Layer w0.254: R30.2 25.175,43.9 25.725,44.45 C9.1 ; C8.2 C9.1 ; U1.10@33.85,34.25 33.184,34.25 29.349,38.086 29.349,41.763 26.662,44.45 C9.1
C9: C9.2 C10.1 R32.2 U1.8 | length 24.1
  Top Layer w0.254: R32.2 25.113,49 25.663,49.55 C10.1 ; C9.2 C10.1 ; U1.8@33.85,35.25 33.334,35.25 30.162,38.422 30.162,46.05 26.662,49.55 C10.1
C10: C10.2 C11.1 R34.2 U1.6 | length 28.5
  Top Layer w0.254: R34.2 25.363,54.1 25.879,54.617 26.578,54.617 C11.1 ; C10.2@26.288,50.577 C10.2 C11.1 ; U1.6@33.85,36.25 33.483,36.25 30.974,38.759 30.974,50.337 26.662,54.65 C11.1
C11: C11.2 C12.1 R13.2 U1.4 | length 32.1
  Top Layer w0.254: R13.2 24.125,59.375 24.5,59.75 C12.1 ; C11.2 C12.1 ; U1.4@33.85,37.25 33.633,37.25 31.787,39.096 31.787,54.624 26.662,59.75 C12.1
C12: C12.2 R37.2 U1.2 | length 29.6
  Top Layer w0.254: C12.2 27.878,61.1 ; R37.2 30.112,61.1 27.878,61.1 ; U1.2 34.532,38.268 33.764,38.268 32.6,39.432 32.6,56.378 27.878,61.1
GND: C13.1 C14.1 C15.1 C16.1 C17.1 C18.1 C19.1 C20.1 C21.1 C22.1 C23.1 L1.2 R40.1 R48.1 R49.1 R52.2 U1.30 U1.31 U3.10 U3.11 U3.12 U3.13 U4.10 U4.11 U4.12 X3.34 X3.36 X3.38 X3.40 | length 11.6
  Bottom Layer w0.508: L1.2 29.125,1.775 33.447,6.097
  other v3: 39.785,22.309 36.303,26.099 33.45,46.1
ISODOWN_N: U2.3 X1.2 | length 4
  Top Layer w0.5: U2.3 56.345,30.595 X1.2
ISODOWN_P: U2.1 X1.1 | length 5
  Top Layer w0.5: U2.1 54.89,26.61 55.7,25.8 X1.1
ISOUP_N: U2.8 X2.2 | length 4.9
  Top Layer w0.5: U2.8 54.89,38.112 55.978,39.2 X2.2
ISOUP_P: U2.6 X2.1 | length 4
  Top Layer w0.5: U2.6 56.345,34.405 X2.1
NetC1_2: C15.2 R44.2 R47.1 | length 4
  Top Layer w0.254: C15.2 44.623,24.85 44.773,25 44.922,25 ; 44.922,25 R47.1
NetC2_2: C16.2 U2.15 | length 8.7
  Top Layer w0.254: C16.2 46.184,23.068 46.288,23.06 47.725,24.294 47.725,29.176 47.65,29.251 47.576,29.325 U2.15
NetC3_2: C19.2 U2.10 | length 5.5
  Top Layer w0.254: v1(44.825,35.7) 44.85,35.675 U2.10
  Bottom Layer w0.254: v1(44.825,35.7) 47.25,35.7 47.65,36.1 C19.2
NetC4_2: C20.2 R45.2 R46.1 | length 9.4
  Top Layer w0.203: v2(44.975,43.725) 45.975,43.725 R46.1 ; v2(45.65,38.275) 46.275,38.9 R45.2
  Bottom Layer w0.203: v2(44.975,43.725) 46.064,42.636 46.064,42.011 C20.2 ; v2(45.65,38.275) 45.65,38.295 46.125,38.77 C20.2@46.125,42
NetD1_1: D1.1 Q1.3 R53.1 | length 9
  Top Layer w0.254: Q1.3@19.765,3.51 Q1.3@19.775,3.5
  Top Layer w0.5: v1(17.15,3) 17.115,3.035 17.115,4.346 D1.1 17.992,4.4 18.882,3.51 Q1.3@19.765,3.51
  Bottom Layer w0.5: R53.1 15.775,4.375 v1(17.15,3)
NetD1_2: D1.2 R1.1 | length 3.1
  Top Layer w0.254: R1.1@11.975,5.1 13.1,5.1 13.8,4.4 D1.2
NetD2_1: D2.1 Q2.3 R54.1 | length 8.8
  Top Layer w0.5: D2.1 17.093,9.468 17.093,8.082 v1(17.125,8.05) ; D2.1@17.225,9.425 18.125,9.425 18.94,8.61 Q2.3
  Bottom Layer w0.5: R54.1 15.375,9.475 16.8,8.05 v1(17.125,8.05)
NetD2_2: D2.2 R2.1 | length 3.1
  Top Layer w0.254: R2.1 12.875,10.225 13.65,9.45 D2.2@14.775,9.45
NetD3_1: D3.1 Q3.3 R55.1 | length 8.9
  Top Layer w0.5: v1(16.9,13.125) 17.075,13.3 17.075,14.55 D3.1@17.1,14.575 ; D3.1 17.992,14.6 18.883,13.71 19.765,13.71 Q3.3@19.8,13.675
  Bottom Layer w0.5: R55.1 14.675,14.575 16.125,13.125 v1(16.9,13.125)
NetD3_2: D3.2 R3.1 | length 3.1
  Top Layer w0.254: R3.1 13,15.325 13.725,14.6 D3.2@14.775,14.6
NetD4_1: D4.1 Q4.3 R56.1 | length 8.8
  Top Layer w0.5: v1(16.94,18.225) 16.975,18.26 16.975,19.475 17.15,19.65 17.175,19.675 18.025,19.675 18.89,18.81 Q4.3
  Bottom Layer w0.5: R56.1 15.036,19.675 16.486,18.225 v1(16.94,18.225)
NetD4_2: D4.2 R4.1 | length 3.1
  Top Layer w0.254: R4.1@12,20.425 12.025,20.45 12.75,20.45 13.5,19.7 D4.2
NetD5_1: D5.1 Q5.3 R57.1 | length 9.2
  Top Layer w0.5: v1(17.225,23.362) 17.19,23.397 17.19,24.671 D5.1 17.992,24.8 18.883,23.91 Q5.3 19.79,23.91 Q5.3@19.8,23.9
  Bottom Layer w0.5: R57.1 14.911,24.775 16.361,23.325 17.225,23.325 v1(17.225,23.362)
NetD5_2: D5.2 R5.1 | length 3.1
  Top Layer w0.254: R5.1 12.95,25.525 13.725,24.75 D5.2@14.8,24.75
NetD6_1: D6.1 Q6.3 R58.1 | length 8.9
  Top Layer w0.5: v1(17.19,28.6) 17.156,28.635 17.156,29.806 D6.1 17.992,29.9 18.883,29.01 19.663,29.01 19.725,29.072 Q6.3@19.725,29.075
  Bottom Layer w0.5: R58.1 15.261,29.875 16.536,28.6 v1(17.19,28.6)
NetD6_2: D6.2 R6.1 | length 3
  Top Layer w0.254: R6.1 13.1,30.625 13.7,30.025 13.706,30.025 13.831,29.9 D6.2@14.75,29.9
NetD7_1: D7.1 Q7.3 R59.1 | length 9.2
  Top Layer w0.5: v1(17.19,33.5) 17.156,33.535 17.156,34.906 D7.1 17.992,35 18.882,34.11 Q7.3 19.815,34.11 Q7.3@19.825,34.1
  Bottom Layer w0.5: R59.1 15.235,34.975 16.627,33.583 17.107,33.583 v1(17.19,33.5)
NetD7_2: D7.2 R7.1 | length 3
  Top Layer w0.254: R7.1@12.05,35.7 13,35.7 13.7,35 D7.2
NetD8_1: D8.1 Q8.3 R60.1 | length 8.8
  Top Layer w0.5: v1(17.1,38.75) 17.081,38.769 17.081,40.081 D8.1 17.992,40.1 18.883,39.21 19.765,39.21 Q8.3@19.775,39.2
  Bottom Layer w0.5: R60.1 14.771,40.075 16.096,38.75 v1(17.1,38.75)
NetD8_2: D8.2 R8.1 | length 3.1
  Top Layer w0.254: R8.1 12.95,40.825 13.75,40.025 D8.2@14.8,40.025
NetD9_1: D9.1 Q9.3 R61.1 | length 9
  Top Layer w0.5: v1(17.1,43.725) 17.081,43.744 17.081,45.181 D9.1 17.992,45.2 18.883,44.31 Q9.3 19.79,44.31 Q9.3@19.8,44.3
  Bottom Layer w0.5: R61.1 14.7,45.175 16.15,43.725 v1(17.1,43.725)
NetD9_2: D9.2 R9.1 | length 3.1
  Top Layer w0.254: R9.1@11.975,45.875 13,45.875 13.675,45.2 D9.2
NetD10_1: D10.1 Q10.3 R62.1 | length 9.2
  Top Layer w0.5: v1(17.19,48.825) 17.156,48.86 17.156,50.206 D10.1 18.325,50.3 19.155,49.469 19.706,49.469 Q10.3@19.825,49.35
  Bottom Layer w0.5: R62.1 14.883,50.275 16.333,48.825 v1(17.19,48.825)
NetD10_2: D10.2 R10.1 | length 3.1
  Top Layer w0.254: R10.1 12.9,51.025 13.675,50.25 D10.2@14.75,50.25
NetD11_1: D11.1 Q11.3 R63.1 | length 8.9
  Top Layer w0.5: v1(17.061,53.975) D11.1 17.992,55.4 18.882,54.51 19.76,54.51 Q11.3@19.8,54.55
  Bottom Layer w0.5: R63.1 14.737,55.375 16.137,53.975 v1(17.061,53.975)
NetD11_2: D11.2 R11.1 | length 3.1
  Top Layer w0.254: R11.1@11.925,56.125 12.975,56.125 13.7,55.4 D11.2
NetD12_1: D12.1 Q12.3 R64.1 | length 8.9
  Top Layer w0.5: v1(17.061,59.102) D12.1 17.992,60.5 18.883,59.61 19.74,59.61 Q12.3@19.8,59.55
  Bottom Layer w0.5: R64.1 14.875,60.475 16.248,59.102 v1(17.061,59.102)
NetD12_2: D12.2 R12.1 | length 3.1
  Top Layer w0.254: R12.1 12.875,61.225 13.625,60.475 D12.2@14.775,60.475
NetD13_2: D13.2 R40.2 | length 2.6
  Top Layer w0.203: R40.2@35.95,43.275 36.273,43.598 38.348,43.598 D13.2@38.375,43.625
NetQ1_1: Q1.1 R15.1 | length 2.9
  Top Layer w0.254: Q1.1@20.225,5.325 20.31,5.24 21.584,5.24 22.044,5.7 R15.1
NetQ2_1: Q2.1 R17.1 | length 2.8
  Top Layer w0.254: Q2.1@20.25,10.35 20.26,10.34 Q2.1 21.584,10.34 22.044,10.8 R17.1
NetQ3_1: Q3.1 R19.1 | length 2.7
  Top Layer w0.254: Q3.1 21.215,15.44 21.65,15.875 R19.1@22.85,15.875
NetQ4_1: Q4.1 R21.1 | length 2.7
  Top Layer w0.254: Q4.1@20.35,20.525 20.365,20.54 21.24,20.54 21.7,21 R21.1
NetQ5_1: Q5.1 R23.1 | length 2.8
  Top Layer w0.254: Q5.1@20.3,25.6 20.34,25.64 21.584,25.64 22.044,26.1 R23.1
NetQ6_1: Q6.1 R25.1 | length 2.8
  Top Layer w0.254: Q6.1@20.275,30.725 20.29,30.74 21.29,30.74 21.75,31.2 R25.1
NetQ7_1: Q7.1 R27.1 | length 2.7
  Top Layer w0.254: Q7.1@20.4,35.875 20.4,35.85 20.41,35.84 21.29,35.84 21.75,36.3 R27.1
NetQ8_1: Q8.1 R29.1 | length 2.7
  Top Layer w0.254: Q8.1@20.325,40.95 20.335,40.94 21.34,40.94 21.8,41.4 R29.1
NetQ9_1: Q9.1 R31.1 | length 2.8
  Top Layer w0.254: Q9.1 21.365,46.04 21.8,46.475 R31.1@22.95,46.475
NetQ10_1: Q10.1 R33.1 | length 2.7
  Top Layer w0.254: Q10.1@20.325,51.125 20.34,51.14 21.29,51.14 21.75,51.6 R33.1
NetQ11_1: Q11.1 R35.1 | length 2.8
  Top Layer w0.254: Q11.1 21.623,56.24 22.033,56.65 22.85,56.65 R35.1
NetQ12_1: Q12.1 R36.1 | length 2.9
  Top Layer w0.254: Q12.1 22.1,61.34 22.85,62.09 R36.1
NetQ13_1: Q13.1 U1.38 | length 31.6
  Top Layer w0.254: U1.38 43.025,33.75 v1(43.8,34.525)
  Bottom Layer w0.254: v1(43.8,34.525) 43.8,37.196 44.425,37.821 44.425,40.5 43.6,41.325 43.6,44.825 44.475,45.7 44.475,51.4 45.262,52.187 53.012,52.187 53.775,52.95 Q13.1
NetR37_2: R47.2 U1.48 U2.16 | length 16.9
  Top Layer w0.254: U1.48 41.91,38.75 41.95,38.79 v1(41.95,39.575) ; v1(44.947,28.25) 45.142,28.055 U2.16 46.36,26.315 R47.2
  Bottom Layer w0.254: v1(41.95,39.575) 41.725,39.35 41.725,31.472 v1(44.947,28.25)
NetR38_1: R44.1 U1.47 U2.14 | length 16.8
  Top Layer w0.254: U1.47 43.085,38.25 43.21,38.375 v1(43.325,38.375) ; v1(44.417,31.2) 44.417,31.028 44.947,30.498 ; R44.1@44.425,26.002 44.327,26.1 44.327,29.878 44.947,30.498 ; U2.14 45.043,30.595 44.947,30.498
  Bottom Layer w0.254: v1(43.325,38.375) 42.763,37.813 42.763,32.854 v1(44.417,31.2)
NetR39_2: R46.2 U1.42 U2.11 | length 21.3
  Top Layer w0.254: U1.42 41.858,35.758 43.126,35.758 44.417,37.049 44.417,41.375 45.209,42.166 45.778,42.166 45.927,42.315 45.927,42.427 46.225,42.725 R46.2 46.325,42.725 46.623,42.427 46.623,42.315 46.772,42.166 47.341,42.166 48.881,40.627 48.881,35.927 47.427,34.472 46.427,34.472 U2.11
NetR40_1: R45.1 U1.41 U2.9 | length 17.6
  Top Layer w0.254: U1.41 43.336,35.25 44.925,36.839 44.925,41.165 45.419,41.658 45.778,41.658 45.927,41.51 45.927,41.398 46.225,41.1 R45.1 R45.1@46.325,41.1 ; U2.9 46.466,36.839 47.965,36.839 48.114,36.988 48.114,40.676 47.131,41.658 46.772,41.658 46.623,41.51 R45.1@46.623,41.398
NetR44_1: R43.1 U4.13 | length 3.7
  Top Layer w0.254: v1(36.495,17.22) 37.273,17.22 37.628,17.575 R43.1
  Bottom Layer w0.254: v1(36.495,17.22) U4.13
NetR48_1: R51.1 U1.45 | length 7.7
  Top Layer w0.203: v2(36.725,36.675) 37.3,37.25 U1.45
  Bottom Layer w0.203: R51.1@34.425,36.675 v2(36.725,36.675)
NetR48_2: R51.2 R52.1 U1.46 | length 9.5
  Top Layer w0.203: v2(36.7,37.75) U1.46
  Bottom Layer w0.203: R52.1@32.375,37.85 R51.2 ; R51.2@34.5,37.9 34.65,37.75 v2(36.7,37.75)
NetR52_1: R50.1 U1.39 | length 3.8
  Top Layer w0.254: v1(39.629,34.975) 39.629,34.946 40.325,34.25 U1.39
  Bottom Layer w0.254: R50.1 38.353,34.975 v1(39.629,34.975)
S1: R15.2 U1.25 | length 31.4
  Top Layer w0.254: R15.2 24.15,5.75 24.448,6.048 25.011,6.048 25.463,6.5 v2(25.6,6.5) ; v2(28.483,6.5) 33.633,11.65 33.633,19.677 41.206,27.25 U1.25
  Bottom Layer w0.254: v2(25.6,6.5) v2(28.483,6.5)
S2: R17.2 U1.23 | length 23.2
  Top Layer w0.254: R17.2 24.15,10.85 24.903,11.603 25.503,11.603 v2(25.6,11.7) ; v2(27.6,11.7) 30.448,14.548 30.448,24.548 30.448,25.623 32.575,27.75 33.65,27.75 U1.23@33.85,27.75
  Bottom Layer w0.254: v2(25.6,11.7) v2(27.6,11.7)
S3: R19.2 U1.21 | length 19.3
  Top Layer w0.254: R19.2 24.15,15.95 24.712,15.95 25.463,16.7 v2(25.6,16.7) ; v2(27.5,16.7) 29.349,18.549 29.349,24.599 29.349,25.76 32.339,28.75 U1.21@33.85,28.75
  Bottom Layer w0.254: v2(25.6,16.7) v2(27.5,16.7)
S4: R21.2 U1.19 | length 15.3
  Top Layer w0.254: R21.2 24.15,21.05 24.85,21.05 v2(25.6,21.8) ; v2(27.5,21.8) 28.483,22.783 28.483,26.099 29.25,26.866 32.134,29.75 33.075,29.75 U1.19@33.85,29.75
  Bottom Layer w0.254: v2(25.6,21.8) v2(27.5,21.8)
S5: R23.2 U1.17 | length 11.6
  Top Layer w0.254: R23.2 24.15,26.15 24.713,26.15 25.463,26.9 v2(25.6,26.9) ; v2(27.5,26.9) 31.35,30.75 U1.17@33.85,30.75
  Bottom Layer w0.254: v2(25.6,26.9) v2@27.4,26.9
S6: R25.2 U1.15 | length 10.2
  Top Layer w0.254: R25.2 24.15,31.25 24.448,31.548 24.961,31.548 25.413,32 v2(25.55,32) ; v2(27.5,32) 28.337,32 28.587,31.75 U1.15@33.85,31.75
  Bottom Layer w0.254: v2(25.55,32) v2(27.5,32)
S7: R27.2 U1.13 | length 11.8
  Top Layer w0.254: R27.2 24.15,36.35 24.448,36.648 25.011,36.648 25.413,37.05 v2(25.55,37.05) ; v2(27.45,37.05) 31.75,32.75 U1.13@33.85,32.75
  Bottom Layer w0.254: v2(25.55,37.05) v2(27.45,37.05)
S8: R29.2 U1.11 | length 15.2
  Top Layer w0.254: R29.2 24.15,41.45 24.448,41.748 25.011,41.748 25.413,42.15 v2(25.55,42.15) ; v2(27.55,42.15) 27.55,39.31 33.11,33.75 U1.11@33.85,33.75
  Bottom Layer w0.254: v2(25.55,42.15) v2(27.55,42.15)
S9: R31.2 U1.9 | length 19.1
  Top Layer w0.254: R31.2 24.15,46.55 24.448,46.848 25.011,46.848 25.363,47.2 v2(25.5,47.2) ; v2(27.55,47.2) 29.755,44.995 29.755,38.254 33.259,34.75 U1.9@33.85,34.75
  Bottom Layer w0.254: v2(25.5,47.2) v2(27.55,47.2)
S10: R33.2 U1.7 | length 23.1
  Top Layer w0.254: R33.2 24.15,51.65 24.448,51.948 25.011,51.948 25.363,52.3 v2(25.5,52.3) ; v2(27.55,52.3) 30.568,49.282 30.568,38.591 33.409,35.75 U1.7@33.85,35.75
  Bottom Layer w0.254: v2(25.5,52.3) v2(27.55,52.3)
S11: R35.2 U1.5 | length 27.1
  Top Layer w0.254: R35.2 24.15,56.75 24.448,57.048 25.011,57.048 25.363,57.4 v2(25.5,57.4) ; v2(27.55,57.4) 31.381,53.569 31.381,38.927 33.558,36.75 U1.5@33.85,36.75
  Bottom Layer w0.254: v2(25.5,57.4) v2(27.55,57.4)
S12: R36.2 U1.3 | length 30.9
  Top Layer w0.254: R36.2 24.15,62.19 25.069,62.19 v2(25.613,62.733) ; v2(28.6,59.3) 32.194,55.706 32.194,39.264 33.689,37.768 34.532,37.768 U1.3
  Bottom Layer w0.254: v2(25.613,62.733) 25.71,62.636 25.71,62.19 v2(28.6,59.3)
SCL: R41.1 U1.33 U3.15 U4.15 | length 46.1
  Top Layer w0.254: v1(35.05,14.575) 38.393,14.575 R41.1 ; v1(38.561,31.35) 38.677,31.35 38.777,31.25 U1.33
  Bottom Layer w0.254: v1(38.561,31.35) 38.561,31.255 38.099,30.792 38.099,24.165 38.557,23.706 38.557,20.289 38.028,19.76 36.423,19.76 35.05,18.387 v1(35.05,14.575) 35.05,10.22 36.495,8.775 47.65,8.775 48.47,7.955 U3.15
SDA: R42.1 U1.32 U3.14 U4.14 | length 44.9
  Top Layer w0.254: v1(36.423,15.9) 38.458,15.9 R42.1 ; v1(39.125,30.213) 39.786,30.213 40.307,30.734 41.834,30.734 U1.32
  Bottom Layer w0.254: v1(36.423,15.9) 36.398,15.875 35.675,15.875 ; v1(39.125,30.213) 38.505,29.593 38.505,24.333 38.964,23.874 38.964,19.426 38.028,18.49 35.824,18.49 35.675,18.341 35.675,15.875 ; U3.14 49.74,8.297 48.847,9.19 37.028,9.19 35.675,10.543 35.675,15.875
t1: U3.1 X3.1 | length 25.2
  Top Layer w0.254: v1(54.25,11.125) 54.25,11.5 54.525,11.775 54.525,14.86 54.825,15.16 v1(54.825,16.775)
  Bottom Layer w0.254: U3.1@47.225,13.2 47.2,13.175 U3.1 47.2,12.1 48.175,11.125 v1(54.25,11.125) ; v1(54.825,16.775) 54.825,16.95 56.875,19 56.875,21.95 54.575,24.25 54.575,24.77 54.705,24.9 X3.1
t2: U3.2 X3.4 | length 16.8
  Top Layer w0.254: v1(49.577,16.051) 49.601,16.051 v1(50.95,17.4)
  Bottom Layer w0.254: U3.2@48.475,12.95 48.47,12.955 U3.2 48.47,14.943 v1(49.577,16.051) ; v1@50.9,17.35 v1(50.95,17.4) 52.125,18.575 52.125,19.1 51.35,19.875 50.925,19.875 50.075,20.725 50.075,25.3 50.475,25.7 X3.4
t3: U3.3 X3.5 | length 23
  Top Layer w0.254: v1(52.925,11.775) 53.007,11.857 53.582,11.857 53.875,12.15 53.875,16.925 54.35,17.4 v1(54.35,17.65)
  Bottom Layer w0.254: U3.3 49.756,13.134 49.756,12.119 50.1,11.775 v1(52.925,11.775) v1@52.95,11.75 ; v1(54.35,17.65) 56.425,19.725 56.425,21.8 54.15,24.075 54.15,26.109 54.541,26.5 X3.5
t4: U3.4 X3.8 | length 17.6
  Top Layer w0.254: v1(51.075,14.75) 51.775,15.45 51.775,18.3 v1(51.3,18.775)
  Bottom Layer w0.254: U3.4@51,13.1 51.042,13.142 51.042,14.717 v1(51.075,14.75) ; v1(51.3,18.775) 50.275,18.775 49.669,19.381 49.669,26.594 50.375,27.3 X3.8
t5: U3.5 X3.9 | length 19.3
  Top Layer w0.254: v1(52.55,14.575) 52.85,14.875 v1(52.85,17.025)
  Bottom Layer w0.254: U3.5@52.3,13.075 52.28,13.095 U3.5 52.28,14.189 52.55,14.459 v1(52.55,14.575) ; v1(52.85,17.025) 52.85,17.25 53.969,18.369 54.494,18.369 56.006,19.881 56.006,21.619 53.744,23.881 53.744,27.544 54.3,28.1 X3.9
t6: U3.6 X3.12 | length 20.9
  Top Layer w0.254: v1(49.327,17.201) v1(49.327,17.201) v1(50.225,18.1)
  Bottom Layer w0.254: v1(49.327,17.201) 51.078,15.45 52.8,15.45 53.55,14.7 53.55,13.25 U3.6@53.65,13.15 ; v1(50.225,18.1) 49.262,19.063 49.262,27.437 50.725,28.9 X3.12
t7: U3.7 X3.13 | length 20.3
  Top Layer w0.254: v1(54.45,19.425) 54.45,19.104 56.175,17.379 56.175,15.8 55.425,15.05 v1(55.425,14.8)
  Bottom Layer w0.254: v1(54.45,19.425) 55,19.975 55,22.05 53.3,23.75 53.3,28.431 54.569,29.7 X3.13 ; U3.7@54.85,13.1 54.838,13.112 54.838,14.181 55.425,14.768 v1(55.425,14.8)
t8: U3.8 X3.16 | length 24.4
  Bottom Layer w0.254: X3.16 50.425,30.5 48.825,28.9 48.825,18.6 51.55,15.875 55.227,15.875 56.09,15.012 56.09,13.215 U3.8@56.05,13.175
t9: U4.1 X3.17 | length 19.3
  Top Layer w0.254: v1(47.441,20.934) 48.209,20.934 53.025,25.75 v1(53.025,31.3)
  Bottom Layer w0.254: U4.1@43.775,21.05 43.843,20.982 47.393,20.982 v1(47.441,20.934) ; v1(53.025,31.3) X3.17
t10: U4.2 X3.20 | length 18.4
  Bottom Layer w0.254: U4.2 46.31,19.76 46.675,20.125 48.025,20.125 48.4,20.5 48.4,29.731 50.769,32.1 X3.20
t11: U4.3 X3.21 | length 23
  Top Layer w0.254: v1(47.65,19.381) 46.821,20.21 46.821,21.191 51.755,26.125 51.755,31.38 v1(53.15,32.775)
  Bottom Layer w0.254: U4.3 46.759,18.49 v1(47.65,19.381) ; v1(53.15,32.775) 53.275,32.9 X3.21
t12: U4.4 X3.24 | length 24
  Bottom Layer w0.254: U4.4 43.805,17.2 42.7,17.2 42.36,17.54 42.36,21.097 43.513,22.25 46.362,22.25 47.994,23.881 47.994,31.244 50.45,33.7 X3.24
t13: U4.5 X3.25 | length 27.9
  Top Layer w0.254: v1(47.994,17.025) 46.415,18.604 46.415,21.359 51.348,26.293 51.348,32.748 v1(53.075,34.475)
  Bottom Layer w0.254: U4.5 46.919,15.95 v1(47.994,17.025) ; v1(53.075,34.475) 53.1,34.5 X3.25
t14: U4.6 X3.28 | length 28.2
  Bottom Layer w0.254: U4.6 42.763,14.68 41.95,15.493 41.95,21.5 43.325,22.875 46.025,22.875 47.587,24.437 47.587,32.118 50.769,35.3 X3.28
t15: U4.7 X3.29 | length 31.1
  Top Layer w0.254: v1(47.302,15.012) 46.008,16.305 46.008,21.528 47.776,23.296 50.942,26.461 50.942,34.017 v1(53.025,36.1)
  Bottom Layer w0.254: U4.7 45.7,13.41 v1(47.302,15.012) ; v1(53.025,36.1) X3.29
t16: U4.8 X3.32 | length 32.9
  Bottom Layer w0.254: U4.8 42.36,12.14 41.5,13 41.5,21.625 43.225,23.35 45.8,23.35 47.15,24.7 47.15,33.281 50.769,36.9 X3.32
temp1: R48.2 U1.27 U3.9 | length 37.7
  Top Layer w0.254: v1(39.785,28.025) 40.1,28.025 40.325,28.25 U1.27